# Altium PCB NBP12 Xilinx Spartan-IIE BGA456 Rev1.00.PcbDoc (part 1 of 2)
Units mm, origin at the board's own origin, x right, y up, seen from the top; angles counter-clockwise.
Board outline 69 x 80.99 mm, 4 copper layers (Top Layer, MidLayer1, InternalPlane1, Bottom Layer); 54 components, 265 nets, 866 pads, 396 vias.
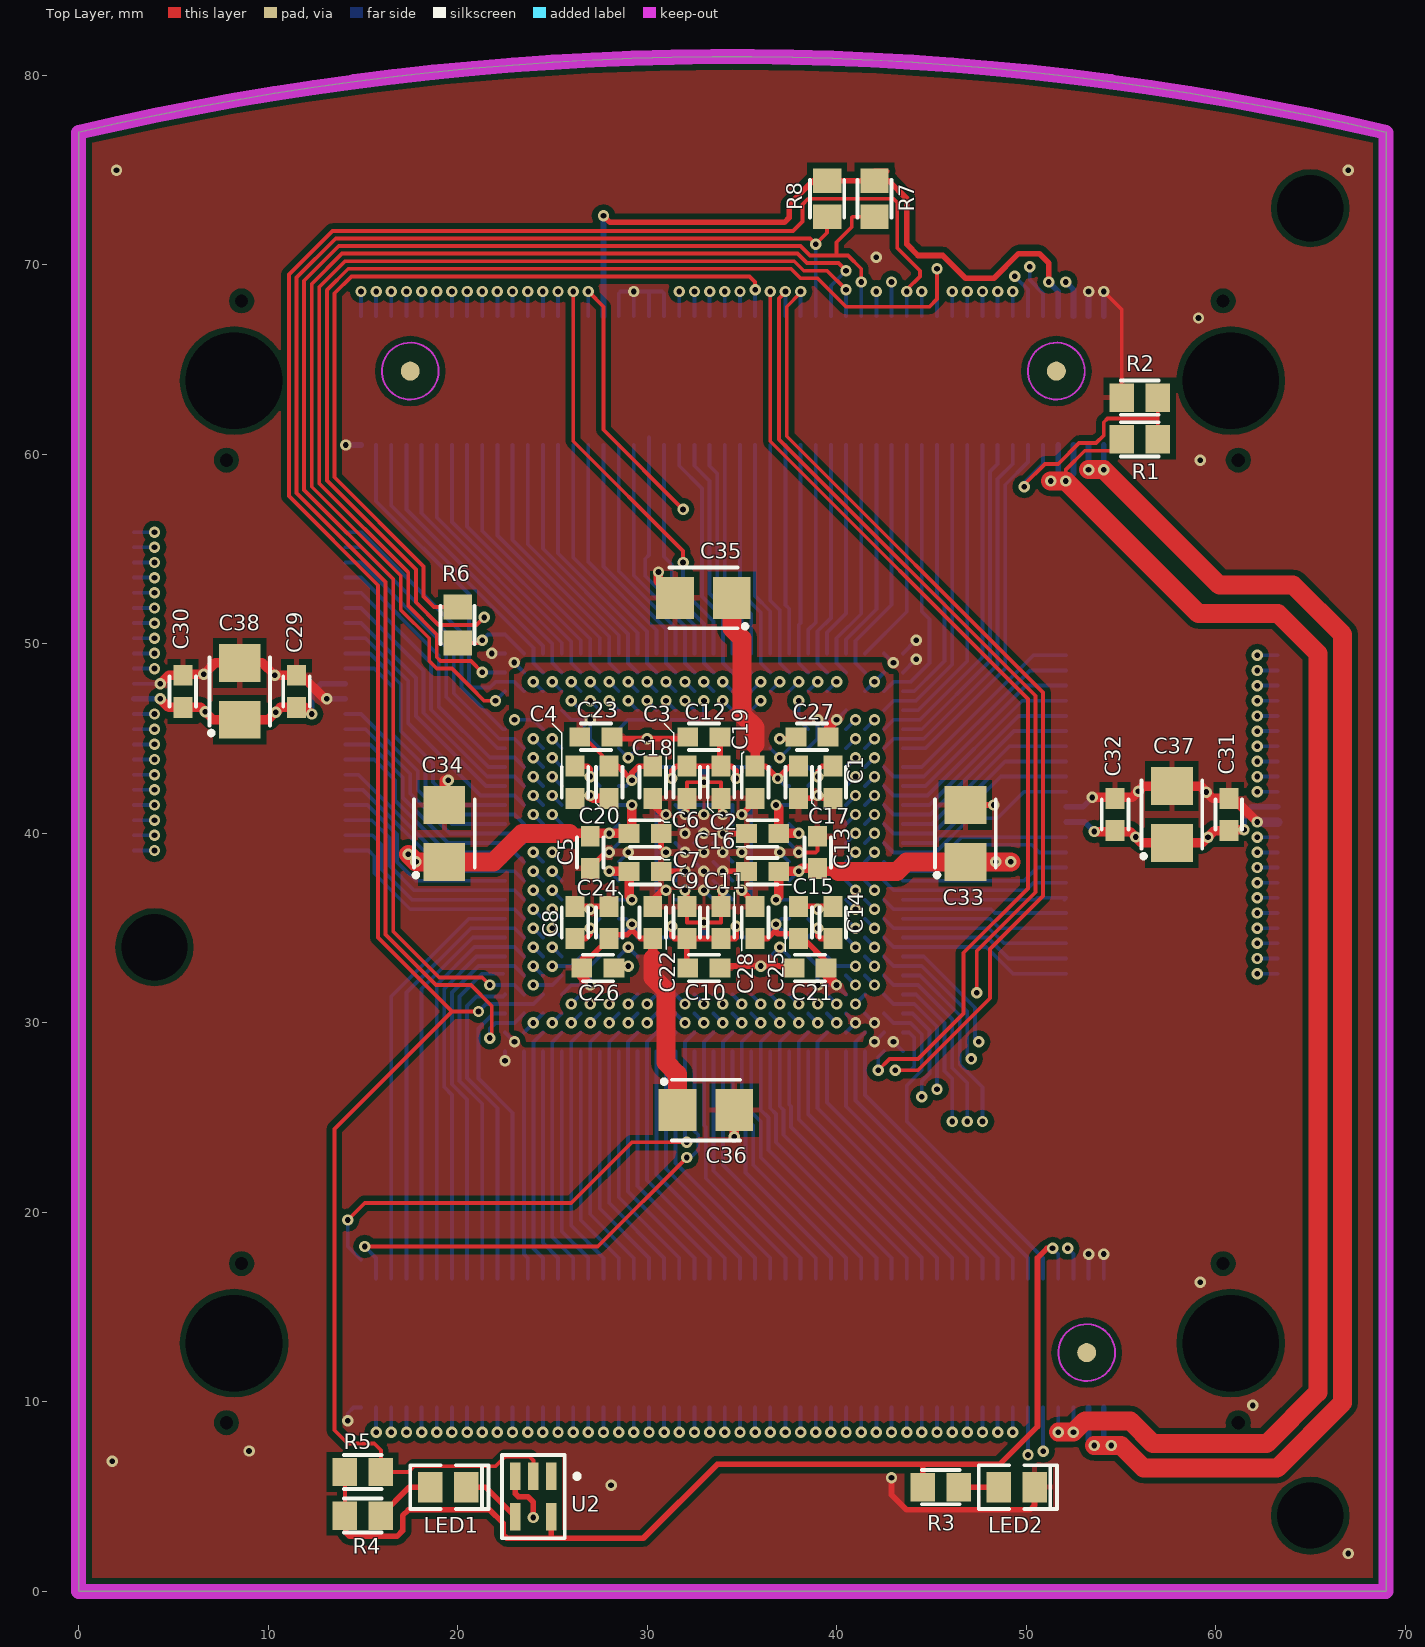
[diagram p0: Top Layer view]
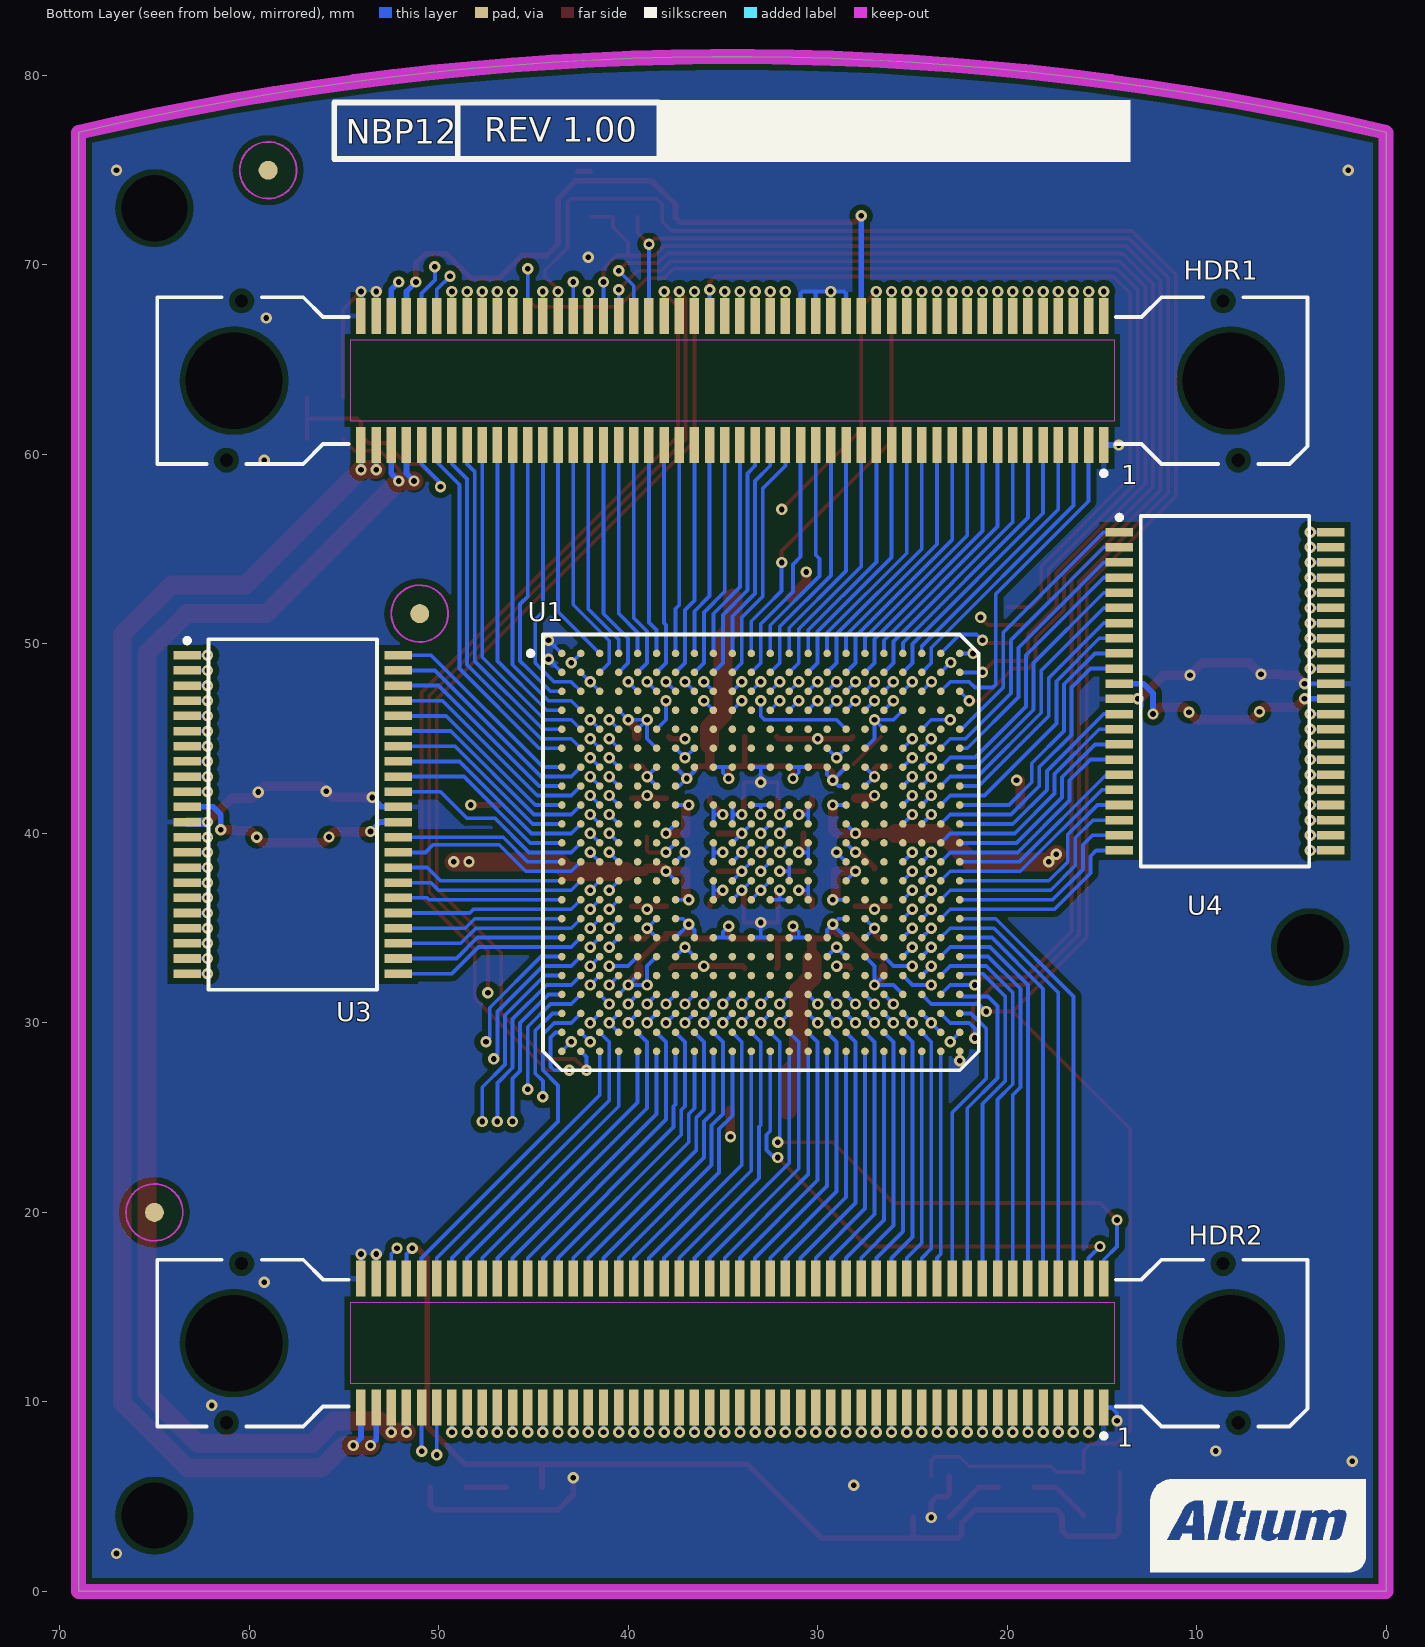
[diagram p1: Bottom Layer view, seen from below]
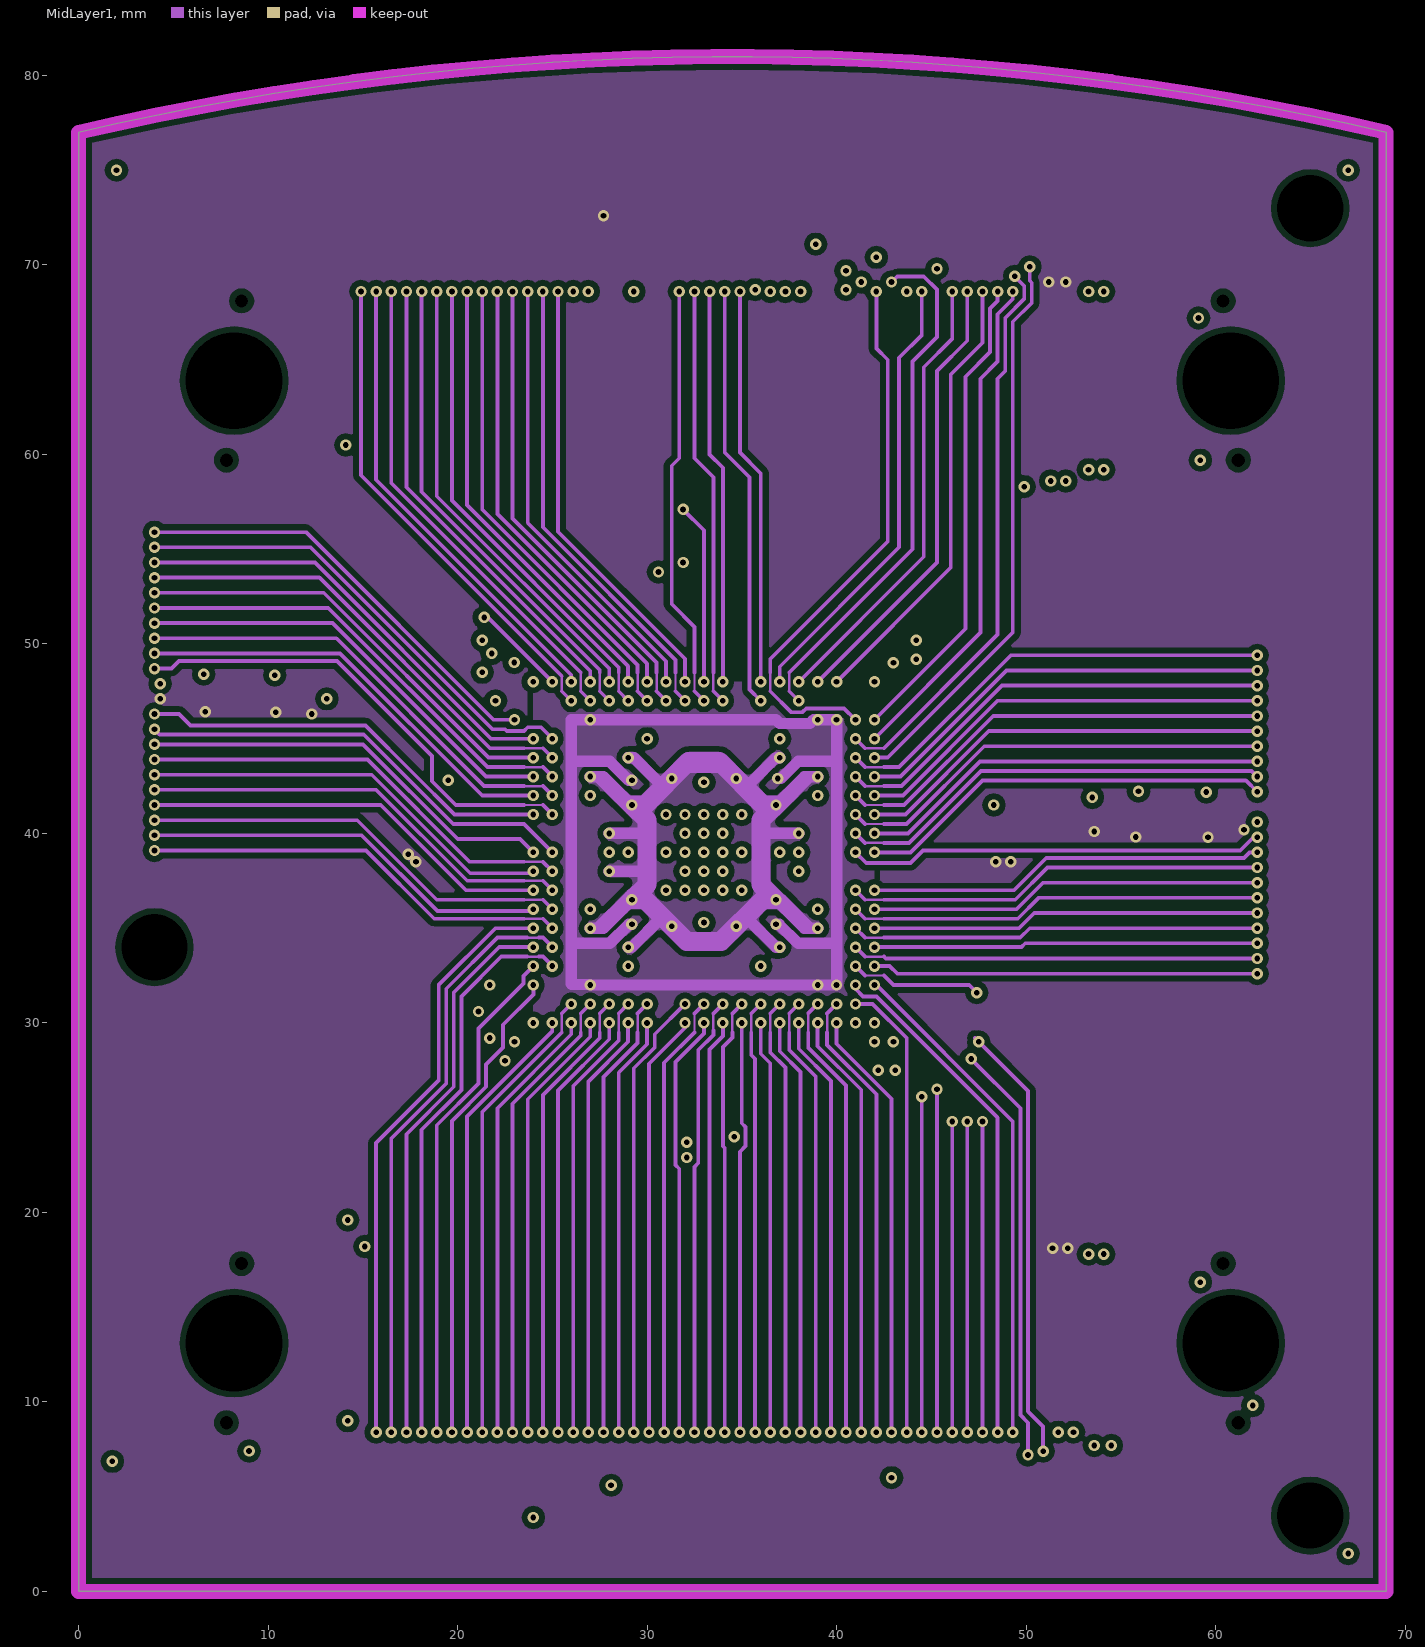
[diagram p2: MidLayer1]
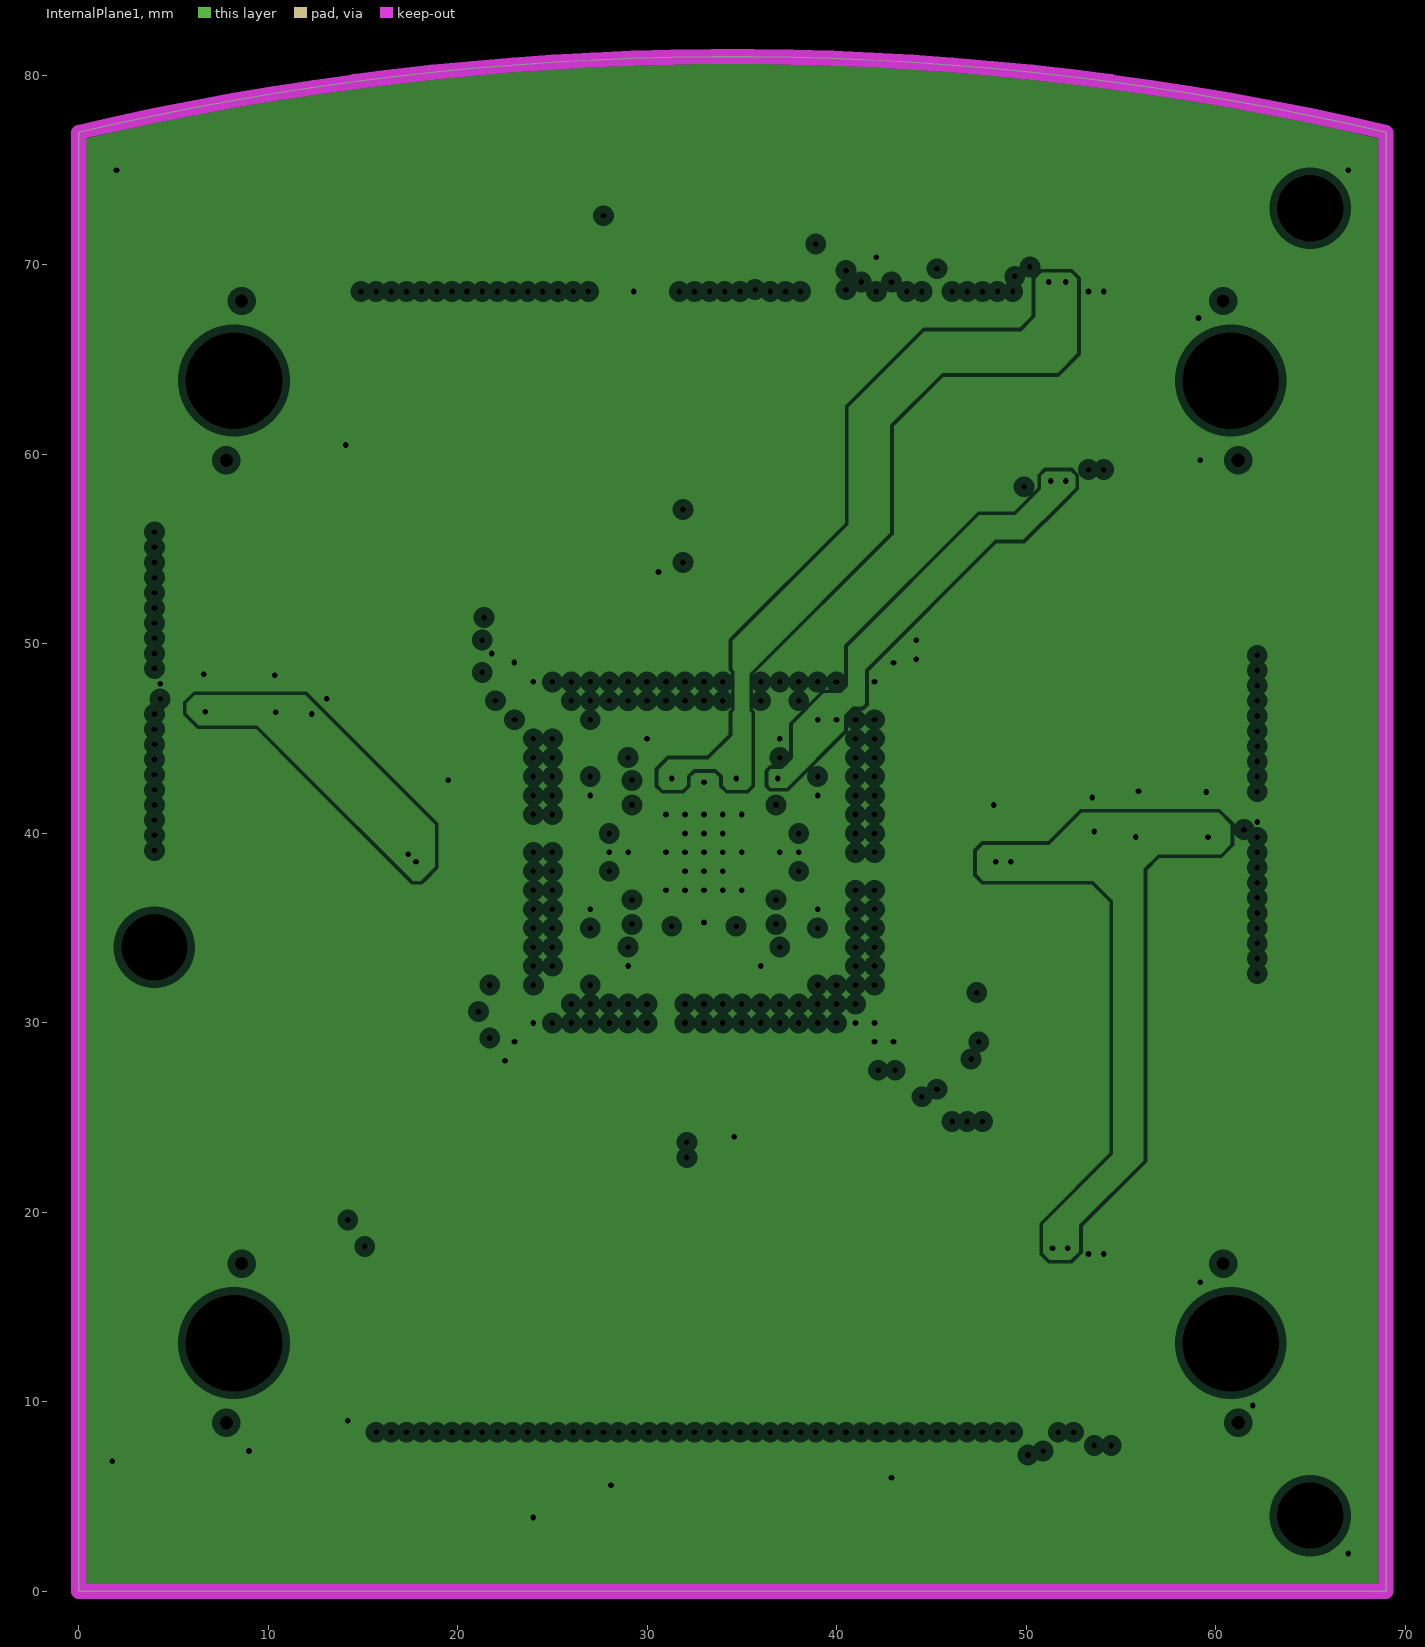
[diagram p3: InternalPlane1, clearances drawn from the general rule]

## Layer stack, top to bottom
Top Layer: signal copper 0.0356
Dielectric: core 0.32, FR-4, Dk 4.8
MidLayer1: signal copper 0.0356
Dielectric: prepreg 0.32, FR-4, Dk 4.8
InternalPlane1: plane copper 0.0356, net (Multiple Nets)
Dielectric: core 0.32, FR-4, Dk 4.8
Bottom Layer: signal copper 0.0356

## Board outline
0,0 0.001,77 cw(c34.5,-69.801) 69,77 69,0

## Design rules (kind name [scope] priority, off if disabled: settings)
Clearance Clearance_Mid [OnLayer('MidLayer1') and not(InPoly) vs (IsVia)] p1: gap=0.127
Clearance Clearance_Polygons [InPoly] p2: gap=0.3
Clearance Clearance_Std [All] p3: gap=0.2
ComponentClearance [All] p1: gap=0.2 collisioncheckmode=3 verticalgap=0.254 showdistances=FALSE
FabricationTestPointUsage TestPointUsage [All] p1 off: valid=0 allowmultiple=FALSE
FabricationTestpoint Testpoint [All] p1 off: side=3 testpointundercomponent=TRUE minsize=1.016 maxsize=2.54 preferedsize=1.524 minholesize=0 maxholesize=1.016 preferedholesize=0.813 testpointgrid=0.025 allowsidetop=TRUE allowsidebottom=TRUE usegrid=TRUE gridtolerance=0
HoleSize [All] p1: absolutevalues=TRUE maxlimit=5.2 minlimit=0.25 maxpercent=80.000 minpercent=20.000
MinimumAnnularRing [not inpadclass('Mounting Holes')] p1: minimumring=0.051
PlaneClearance [All] p1: clearance=0.4
PlaneConnect [All] p1: planeconnectstyle=Direct reliefexpansion=0.2 reliefentries=4 reliefconductorwidth=0.2 reliefairgap=0.2
PolygonConnect FPGA_Connect [(InComponent('U1') AND InNet('GND'))] p1: connectstyle=NoConnect reliefconductorwidth=0.254 reliefentries=4 polygonreliefangle="90 Angle"
PolygonConnect [All] p2: connectstyle=Relief reliefconductorwidth=0.3 reliefentries=4 polygonreliefangle="90 Angle"
RoutingLayers [All] p1: top layer_v5=TRUE mid layer 1_v5=FALSE bottom layer_v5=TRUE
RoutingVias [All] p1: holewidth=0.3 width=0.6 viastyle="Through Hole" minholewidth=0.3 minwidth=0.6 maxholewidth=0.5 maxwidth=0.9
SMDNeckDown [All] p1: percent=100.000
SilkscreenOverComponentPads [All] p1: minsilkscreentomaskgap=0.254
SolderMaskExpansion SolderMaskExpansion_Vias [IsVia] p1: expansion=-0.15
SolderMaskExpansion [All] p2: expansion=0.1
Width Width_Arc [isarc] p1: maxlimit=0.8 minlimit=0.1 preferedwidth=0.1
Width [All] p2: maxlimit=1.5 minlimit=0.127 preferedwidth=0.2
20 further rules are at their usual default settings.

## Classes and differential pairs
pad class "Mounting Holes": Free-LP HDR1-MH1 HDR1-MH2 HDR1-MH3 HDR1-MH4 HDR1-MH5 HDR1-MH6 HDR2-MH1 HDR2-MH2 HDR2-MH3 HDR2-MH4 HDR2-MH5 HDR2-MH6

## Components (designator, comment, footprint, x,y, rotation, side; value= is the part's Value field where it differs from the comment)
C1 "0.1uF" CC1608-0603 39.8,42.7 r90 top
C2 "0.1uF" CC1608-0603 33.9,42.7 r90 top
C3 "0.1uF" CC1608-0603 32.1,42.7 r90 top
C4 "0.1uF" CC1608-0603 26.2,42.7 r90 top
C5 "0.1uF" CC1608-0603 27,39 r90 top
C6 "0.1uF" CC1608-0603 29.9,40 r180 top
C7 "0.1uF" CC1608-0603 29.9,38 r180 top
C8 "0.1uF" CC1608-0603 26.2,35.3 r270 top
C9 "0.1uF" CC1608-0603 32.1,35.3 r270 top
C10 "0.1uF" CC1608-0603 33,32.9 r180 top
C11 "0.1uF" CC1608-0603 33.9,35.3 r270 top
C12 "0.1uF" CC1608-0603 33,45.1 r0 top
C13 "0.1uF" CC1608-0603 39,39 r270 top
C14 "0.1uF" CC1608-0603 39.8,35.3 r270 top
C15 "0.1uF" CC1608-0603 36.1,38 r0 top
C16 "0.1uF" CC1608-0603 36.1,40 r0 top
C17 "0.1uF" CC1608-0603 38,42.7 r90 top
C18 "0.1uF" CC1608-0603 30.3,42.7 r90 top
C19 "0.1uF" CC1608-0603 35.7,42.7 r90 top
C20 "0.1uF" CC1608-0603 28,42.7 r90 top
C21 "0.1uF" CC1608-0603 38.6,32.9 r0 top
C22 "0.1uF" CC1608-0603 30.3,35.3 r270 top
C23 "0.1uF" CC1608-0603 27.3,45.1 r180 top
C24 "0.1uF" CC1608-0603 28,35.3 r270 top
C25 "0.1uF" CC1608-0603 38,35.3 r270 top
C26 "0.1uF" CC1608-0603 27.4,32.9 r180 top
C27 "0.1uF" CC1608-0603 38.7,45.1 r0 top
C28 "0.1uF" CC1608-0603 35.7,35.3 r270 top
C29 "0.1uF" CC1608-0603 11.5,47.5 r270 top
C30 "0.1uF" CC1608-0603 5.5,47.5 r270 top
C31 "0.1uF" CC1608-0603 60.7,41 r270 top
C32 "0.1uF" CC1608-0603 54.7,41 r270 top
C33 "10uF" MCCT-B 46.8,40 r90 top
C34 "10uF" MCCT-B 19.3,40 r90 top
C35 "10uF" MCCT-B 32.971,52.429 r180 top
C36 "10uF" MCCT-B 33.1,25.4 r0 top
C37 "10uF" MCCT-B 57.7,41 r90 top
C38 "10uF" MCCT-B 8.5,47.5 r90 top
HDR1 "54075-1009" 54075 34.5,63.9 r0 bottom locked
HDR2 "54075-1009" 54075 34.5,13.1 r0 bottom locked
LED1 "HSMG-C670" "SMD _LED" 19.5,5.5 r180 top locked
LED2 "HSMH-C670" "SMD _LED" 49.5,5.5 r180 top locked
R1 "DO NOT INSTALL" CC2012-0805#1 56,60.8 r0 top
R2 "DO NOT INSTALL" CC2012-0805#1 56,63 r180 top
R3 "270R" CC2012-0805#1 45.5,5.5 r0 top
R4 "270R" CC2012-0805#1 15,4 r0 top
R5 "4K7" CC2012-0805#1 15,6.3 r0 top
R6 "100R" CC2012-0805#2 20,51 r90 top
R7 "4K7" CC2012-0805#1 42,73.5 r270 top
R8 "4K7" CC2012-0805#1 39.5,73.5 r270 top
U1 "XC2S600E-6FG456C" FG456 33,39 r180 bottom locked
U2 "SN74AHC1G04DBVR" SO-G5/P.95 24,5 r180 top
U3 "SRAM 512Kx16 TSOP44" SO-G44/P.8 57.7,41 r270 bottom
U4 "SRAM 512Kx16 TSOP44" SO-G44/P.8 8.5,47.5 r270 bottom locked

## Footprints (in the part's own frame and the unit in brackets; to place one, negate y for a bottom-side part, rotate by r counter-clockwise, add the part's x,y. Pads: shape width x height; smd on the part's side, far side on the other; paste and mask are expansions set on the pad)
54075 [mm] "Connector; Docking Station, Receptacle; 100 Position; Vertical"
  rect 0.5x1.9 smd: 1(-19.6,3.4) 2(-19.6,-3.4) 3(-18.8,3.4) 4(-18.8,-3.4) 5(-18,3.4) 6(-18,-3.4) 7(-17.2,3.4) 8(-17.2,-3.4) 9(-16.4,3.4) 10(-16.4,-3.4) 11(-15.6,3.4) 12(-15.6,-3.4) 13(-14.8,3.4) 14(-14.8,-3.4) 15(-14,3.4) 16(-14,-3.4) 17(-13.2,3.4) 18(-13.2,-3.4) 19(-12.4,3.4) 20(-12.4,-3.4) 21(-11.6,3.4) 22(-11.6,-3.4) 23(-10.8,3.4) 24(-10.8,-3.4) 25(-10,3.4) 26(-10,-3.4) 27(-9.2,3.4) 28(-9.2,-3.4) 29(-8.4,3.4) 30(-8.4,-3.4) 31(-7.6,3.4) 32(-7.6,-3.4) 33(-6.8,3.4) 34(-6.8,-3.4) 35(-6,3.4) 36(-6,-3.4) 37(-5.2,3.4) 38(-5.2,-3.4) 39(-4.4,3.4) 40(-4.4,-3.4) 41(-3.6,3.4) 42(-3.6,-3.4) 43(-2.8,3.4) 44(-2.8,-3.4) 45(-2,3.4) 46(-2,-3.4) 47(-1.2,3.4) 48(-1.2,-3.4) 49(-0.4,3.4) 50(-0.4,-3.4) 51(0.4,3.4) 52(0.4,-3.4) 53(1.2,3.4) 54(1.2,-3.4) 55(2,3.4) 56(2,-3.4) 57(2.8,3.4) 58(2.8,-3.4) 59(3.6,3.4) 60(3.6,-3.4) 61(4.4,3.4) 62(4.4,-3.4) 63(5.2,3.4) 64(5.2,-3.4) 65(6,3.4) 66(6,-3.4) 67(6.8,3.4) 68(6.8,-3.4) 69(7.6,3.4) 70(7.6,-3.4) 71(8.4,3.4) 72(8.4,-3.4) 73(9.2,3.4) 74(9.2,-3.4) 75(10,3.4) 76(10,-3.4) 77(10.8,3.4) 78(10.8,-3.4) 79(11.6,3.4) 80(11.6,-3.4) 81(12.4,3.4) 82(12.4,-3.4) 83(13.2,3.4) 84(13.2,-3.4) 85(14,3.4) 86(14,-3.4) 87(14.8,3.4) 88(14.8,-3.4) 89(15.6,3.4) 90(15.6,-3.4) 91(16.4,3.4) 92(16.4,-3.4) 93(17.2,3.4) 94(17.2,-3.4) 95(18,3.4) 96(18,-3.4) 97(18.8,3.4) 98(18.8,-3.4) 99(19.6,3.4) 100(19.6,-3.4)
  round 0.5 hole 0.7 unplated: MH1(-26.7,4.2) MH2(-25.9,-4.2) MH3(26.7,4.2) MH4(25.9,-4.2)
  round 4.8 hole 5.1 unplated: MH5(-26.3,0) MH6(26.3,0)
  Top Layer keep-out region: -20.15,2.15 20.15,2.15 20.15,-2.15 -20.15,-2.15
  silkscreen extent -30.35,-4.4 30.35,5.02
CC1608-0603 [mm]
  rect 1.1x1 smd: 1(-0.85,0) 2(0.85,0)
  silkscreen extent -0.8,-0.7 0.8,0.7
CC2012-0805#1 [mm]
  rect 1.3x1.5 smd: 1(-0.95,0) 2(0.95,0)
  silkscreen extent -1,-0.9 1,0.9
CC2012-0805#2 [mm]
  rect 1.3x1.5 smd: 1(-0.95,0.003) 2(0.95,0.003)
  silkscreen extent -1,-0.9 1,0.9
FG456 [mm] "456-Ball Fine Pitch Ball Grid Array (FG456)"
  round 0.4 smd: A1(-10.5,10.5) A2(-9.5,10.5) A3(-8.5,10.5) A4(-7.5,10.5) A5(-6.5,10.5) A6(-5.5,10.5) A7(-4.5,10.5) A8(-3.5,10.5) A9(-2.5,10.5) A10(-1.5,10.5) A11(-0.5,10.5) A12(0.5,10.5) A13(1.5,10.5) A14(2.5,10.5) A15(3.5,10.5) A16(4.5,10.5) A17(5.5,10.5) A18(6.5,10.5) A19(7.5,10.5) A20(8.5,10.5) A21(9.5,10.5) A22(10.5,10.5) AA1(-10.5,-9.5) AA2(-9.5,-9.5) AA3(-8.5,-9.5) AA4(-7.5,-9.5) AA5(-6.5,-9.5) AA6(-5.5,-9.5) AA7(-4.5,-9.5) AA8(-3.5,-9.5) AA9(-2.5,-9.5) AA10(-1.5,-9.5) AA11(-0.5,-9.5) AA12(0.5,-9.5) AA13(1.5,-9.5) AA14(2.5,-9.5) AA15(3.5,-9.5) AA16(4.5,-9.5) AA17(5.5,-9.5) AA18(6.5,-9.5) AA19(7.5,-9.5) AA20(8.5,-9.5) AA21(9.5,-9.5) AA22(10.5,-9.5) AB1(-10.5,-10.5) AB2(-9.5,-10.5) AB3(-8.5,-10.5) AB4(-7.5,-10.5) AB5(-6.5,-10.5) AB6(-5.5,-10.5) AB7(-4.5,-10.5) AB8(-3.5,-10.5) AB9(-2.5,-10.5) AB10(-1.5,-10.5) AB11(-0.5,-10.5) AB12(0.5,-10.5) AB13(1.5,-10.5) AB14(2.5,-10.5) AB15(3.5,-10.5) AB16(4.5,-10.5) AB17(5.5,-10.5) AB18(6.5,-10.5) AB19(7.5,-10.5) AB20(8.5,-10.5) AB21(9.5,-10.5) AB22(10.5,-10.5) B1(-10.5,9.5) B2(-9.5,9.5) B3(-8.5,9.5) B4(-7.5,9.5) B5(-6.5,9.5) B6(-5.5,9.5) B7(-4.5,9.5) B8(-3.5,9.5) B9(-2.5,9.5) B10(-1.5,9.5) B11(-0.5,9.5) B12(0.5,9.5) B13(1.5,9.5) B14(2.5,9.5) B15(3.5,9.5) B16(4.5,9.5) B17(5.5,9.5) B18(6.5,9.5) B19(7.5,9.5) B20(8.5,9.5) B21(9.5,9.5) B22(10.5,9.5) C1(-10.5,8.5) C2(-9.5,8.5) C3(-8.5,8.5) C4(-7.5,8.5) C5(-6.5,8.5) C6(-5.5,8.5) C7(-4.5,8.5) C8(-3.5,8.5) C9(-2.5,8.5) C10(-1.5,8.5) C11(-0.5,8.5) C12(0.5,8.5) C13(1.5,8.5) C14(2.5,8.5) C15(3.5,8.5) C16(4.5,8.5) C17(5.5,8.5) C18(6.5,8.5) C19(7.5,8.5) C20(8.5,8.5) C21(9.5,8.5) C22(10.5,8.5) D1(-10.5,7.5) D2(-9.5,7.5) D3(-8.5,7.5) D4(-7.5,7.5) D5(-6.5,7.5) D6(-5.5,7.5) D7(-4.5,7.5) D8(-3.5,7.5) D9(-2.5,7.5) D10(-1.5,7.5) D11(-0.5,7.5) D12(0.5,7.5) D13(1.5,7.5) D14(2.5,7.5) D15(3.5,7.5) D16(4.5,7.5) D17(5.5,7.5) D18(6.5,7.5) D19(7.5,7.5) D20(8.5,7.5) D21(9.5,7.5) D22(10.5,7.5) E1(-10.5,6.5) E2(-9.5,6.5) E3(-8.5,6.5) E4(-7.5,6.5) E5(-6.5,6.5) E6(-5.5,6.5) E7(-4.5,6.5) E8(-3.5,6.5) E9(-2.5,6.5) E10(-1.5,6.5) E11(-0.5,6.5) E12(0.5,6.5) E13(1.5,6.5) E14(2.5,6.5) E15(3.5,6.5) E16(4.5,6.5) E17(5.5,6.5) E18(6.5,6.5) E19(7.5,6.5) E20(8.5,6.5) E21(9.5,6.5) E22(10.5,6.5) F1(-10.5,5.5) F2(-9.5,5.5) F3(-8.5,5.5) F4(-7.5,5.5) F5(-6.5,5.5) F6(-5.5,5.5) F7(-4.5,5.5) F8(-3.5,5.5) F9(-2.5,5.5) F10(-1.5,5.5) F11(-0.5,5.5) F12(0.5,5.5) F13(1.5,5.5) F14(2.5,5.5) F15(3.5,5.5) F16(4.5,5.5) F17(5.5,5.5) F18(6.5,5.5) F19(7.5,5.5) F20(8.5,5.5) F21(9.5,5.5) F22(10.5,5.5) G1(-10.5,4.5) G2(-9.5,4.5) G3(-8.5,4.5) G4(-7.5,4.5) G5(-6.5,4.5) G6(-5.5,4.5) G7(-4.5,4.5) G8(-3.5,4.5) G9(-2.5,4.5) G10(-1.5,4.5) G11(-0.5,4.5) G12(0.5,4.5) G13(1.5,4.5) G14(2.5,4.5) G15(3.5,4.5) G16(4.5,4.5) G17(5.5,4.5) G18(6.5,4.5) G19(7.5,4.5) G20(8.5,4.5) G21(9.5,4.5) G22(10.5,4.5) H1(-10.5,3.5) H2(-9.5,3.5) H3(-8.5,3.5) H4(-7.5,3.5) H5(-6.5,3.5) H6(-5.5,3.5) H7(-4.5,3.5) H16(4.5,3.5) H17(5.5,3.5) H18(6.5,3.5) H19(7.5,3.5) H20(8.5,3.5) H21(9.5,3.5) H22(10.5,3.5) J1(-10.5,2.5) J2(-9.5,2.5) J3(-8.5,2.5) J4(-7.5,2.5) J5(-6.5,2.5) J6(-5.5,2.5) J7(-4.5,2.5) J9(-2.5,2.5) J10(-1.5,2.5) J11(-0.5,2.5) J12(0.5,2.5) J13(1.5,2.5) J14(2.5,2.5) J16(4.5,2.5) J17(5.5,2.5) J18(6.5,2.5) J19(7.5,2.5) J20(8.5,2.5) J21(9.5,2.5) J22(10.5,2.5) K1(-10.5,1.5) K2(-9.5,1.5) K3(-8.5,1.5) K4(-7.5,1.5) K5(-6.5,1.5) K6(-5.5,1.5) K7(-4.5,1.5) K9(-2.5,1.5) K10(-1.5,1.5) K11(-0.5,1.5) K12(0.5,1.5) K13(1.5,1.5) K14(2.5,1.5) K16(4.5,1.5) K17(5.5,1.5) K18(6.5,1.5) K19(7.5,1.5) K20(8.5,1.5) K21(9.5,1.5) K22(10.5,1.5) L1(-10.5,0.5) L2(-9.5,0.5) L3(-8.5,0.5) L4(-7.5,0.5) L5(-6.5,0.5) L6(-5.5,0.5) L7(-4.5,0.5) L9(-2.5,0.5) L10(-1.5,0.5) L11(-0.5,0.5) L12(0.5,0.5) L13(1.5,0.5) L14(2.5,0.5) L16(4.5,0.5) L17(5.5,0.5) L18(6.5,0.5) L19(7.5,0.5) L20(8.5,0.5) L21(9.5,0.5) L22(10.5,0.5) M1(-10.5,-0.5) M2(-9.5,-0.5) M3(-8.5,-0.5) M4(-7.5,-0.5) M5(-6.5,-0.5) M6(-5.5,-0.5) M7(-4.5,-0.5) M9(-2.5,-0.5) M10(-1.5,-0.5) M11(-0.5,-0.5) M12(0.5,-0.5) M13(1.5,-0.5) M14(2.5,-0.5) M16(4.5,-0.5) M17(5.5,-0.5) M18(6.5,-0.5) M19(7.5,-0.5) M20(8.5,-0.5) M21(9.5,-0.5) M22(10.5,-0.5) N1(-10.5,-1.5) N2(-9.5,-1.5) N3(-8.5,-1.5) N4(-7.5,-1.5) N5(-6.5,-1.5) N6(-5.5,-1.5) N7(-4.5,-1.5) N9(-2.5,-1.5) N10(-1.5,-1.5) N11(-0.5,-1.5) N12(0.5,-1.5) N13(1.5,-1.5) N14(2.5,-1.5) N16(4.5,-1.5) N17(5.5,-1.5) N18(6.5,-1.5) N19(7.5,-1.5) N20(8.5,-1.5) N21(9.5,-1.5) N22(10.5,-1.5) P1(-10.5,-2.5) P2(-9.5,-2.5) P3(-8.5,-2.5) P4(-7.5,-2.5) P5(-6.5,-2.5) P6(-5.5,-2.5) P7(-4.5,-2.5) P9(-2.5,-2.5) P10(-1.5,-2.5) P11(-0.5,-2.5) P12(0.5,-2.5) P13(1.5,-2.5) P14(2.5,-2.5) P16(4.5,-2.5) P17(5.5,-2.5) P18(6.5,-2.5) P19(7.5,-2.5) P20(8.5,-2.5) P21(9.5,-2.5) P22(10.5,-2.5) R1(-10.5,-3.5) R2(-9.5,-3.5) R3(-8.5,-3.5) R4(-7.5,-3.5) R5(-6.5,-3.5) R6(-5.5,-3.5) R7(-4.5,-3.5) R16(4.5,-3.5) R17(5.5,-3.5) R18(6.5,-3.5) R19(7.5,-3.5) R20(8.5,-3.5) R21(9.5,-3.5) R22(10.5,-3.5) T1(-10.5,-4.5) T2(-9.5,-4.5) T3(-8.5,-4.5) T4(-7.5,-4.5) T5(-6.5,-4.5) T6(-5.5,-4.5) T7(-4.5,-4.5) T8(-3.5,-4.5) T9(-2.5,-4.5) T10(-1.5,-4.5) T11(-0.5,-4.5) T12(0.5,-4.5) T13(1.5,-4.5) T14(2.5,-4.5) T15(3.5,-4.5) T16(4.5,-4.5) T17(5.5,-4.5) T18(6.5,-4.5) T19(7.5,-4.5) T20(8.5,-4.5) T21(9.5,-4.5) T22(10.5,-4.5) U1(-10.5,-5.5) U2(-9.5,-5.5) U3(-8.5,-5.5) U4(-7.5,-5.5) U5(-6.5,-5.5) U6(-5.5,-5.5) U7(-4.5,-5.5) U8(-3.5,-5.5) U9(-2.5,-5.5) U10(-1.5,-5.5) U11(-0.5,-5.5) U12(0.5,-5.5) U13(1.5,-5.5) U14(2.5,-5.5) U15(3.5,-5.5) U16(4.5,-5.5) U17(5.5,-5.5) U18(6.5,-5.5) U19(7.5,-5.5) U20(8.5,-5.5) U21(9.5,-5.5) U22(10.5,-5.5) V1(-10.5,-6.5) V2(-9.5,-6.5) V3(-8.5,-6.5) V4(-7.5,-6.5) V5(-6.5,-6.5) V6(-5.5,-6.5) V7(-4.5,-6.5) V8(-3.5,-6.5) V9(-2.5,-6.5) V10(-1.5,-6.5) V11(-0.5,-6.5) V12(0.5,-6.5) V13(1.5,-6.5) V14(2.5,-6.5) V15(3.5,-6.5) V16(4.5,-6.5) V17(5.5,-6.5) V18(6.5,-6.5) V19(7.5,-6.5) V20(8.5,-6.5) V21(9.5,-6.5) V22(10.5,-6.5) W1(-10.5,-7.5) W2(-9.5,-7.5) W3(-8.5,-7.5) W4(-7.5,-7.5) W5(-6.5,-7.5) W6(-5.5,-7.5) W7(-4.5,-7.5) W8(-3.5,-7.5) W9(-2.5,-7.5) W10(-1.5,-7.5) W11(-0.5,-7.5) W12(0.5,-7.5) W13(1.5,-7.5) W14(2.5,-7.5) W15(3.5,-7.5) W16(4.5,-7.5) W17(5.5,-7.5) W18(6.5,-7.5) W19(7.5,-7.5) W20(8.5,-7.5) W21(9.5,-7.5) W22(10.5,-7.5) Y1(-10.5,-8.5) Y2(-9.5,-8.5) Y3(-8.5,-8.5) Y4(-7.5,-8.5) Y5(-6.5,-8.5) Y6(-5.5,-8.5) Y7(-4.5,-8.5) Y8(-3.5,-8.5) Y9(-2.5,-8.5) Y10(-1.5,-8.5) Y11(-0.5,-8.5) Y12(0.5,-8.5) Y13(1.5,-8.5) Y14(2.5,-8.5) Y15(3.5,-8.5) Y16(4.5,-8.5) Y17(5.5,-8.5) Y18(6.5,-8.5) Y19(7.5,-8.5) Y20(8.5,-8.5) Y21(9.5,-8.5) Y22(10.5,-8.5)
  silkscreen extent -12.28,-11.5 11.5,11.5
MCCT-B [mm]
  rect 2x2.2 smd: 1(-1.5,0) 2(1.5,0)
  silkscreen extent -2.3,-1.6 1.8,1.6
"SMD _LED" [mm]
  rect 1.3x1.6 smd: 1(0.95,0) 2(-0.95,0)
  silkscreen extent -2.13,-1.15 2,1.15
SO-G5/P.95 [mm]
  rect 0.55x1.45 smd: 1(-0.95,-1.075) 2(0,-1.075) 3(0.95,-1.075) 4(0.95,1.075) 5(-0.95,1.075)
  silkscreen extent -2.43,-2.2 1.65,2.2
SO-G44/P.8 [mm]
  rect 0.45x1.45 smd: 1(-8.4,-5.575) 2(-7.6,-5.575) 3(-6.8,-5.575) 4(-6,-5.575) 5(-5.2,-5.575) 6(-4.4,-5.575) 7(-3.6,-5.575) 8(-2.8,-5.575) 9(-2,-5.575) 10(-1.2,-5.575) 11(-0.4,-5.575) 12(0.4,-5.575) 13(1.2,-5.575) 14(2,-5.575) 15(2.8,-5.575) 16(3.6,-5.575) 17(4.4,-5.575) 18(5.2,-5.575) 19(6,-5.575) 20(6.8,-5.575) 21(7.6,-5.575) 22(8.4,-5.575) 23(8.4,5.575) 24(7.6,5.575) 25(6.8,5.575) 26(6,5.575) 27(5.2,5.575) 28(4.4,5.575) 29(3.6,5.575) 30(2.8,5.575) 31(2,5.575) 32(1.2,5.575) 33(0.4,5.575) 34(-0.4,5.575) 35(-1.2,5.575) 36(-2,5.575) 37(-2.8,5.575) 38(-3.6,5.575) 39(-4.4,5.575) 40(-5.2,5.575) 41(-6,5.575) 42(-6.8,5.575) 43(-7.6,5.575) 44(-8.4,5.575)
  silkscreen extent -9.3,-5.7 9.25,4.45

## Part data
C1 C2 C3 C4 C5 C6 C7 C8 C9 C10 C11 C12 C13 C14 C15 C16 C17 C18 C19 C20 C21 C22 C23 C24 C25 C26 C27 C28 C29 C30 C31 C32: library part CAP, "Capacitor"
C33 C34 C35 C36 C37 C38: library part CAP_POLAR, "Polar Capacitor"
HDR1 HDR2: "Board-to-Board, Docking Station, 0.80mm (.031\") Pitch, Shielded Receptacle, Vertical, Ultra Low Profile, SMT"
LED1: library part HSMX-C670, "GREEN AS AlGaAs SMD LED"
LED2: library part HSMX-C670, "RED AS AlGaAs SMD LED"
R1 R2 R3 R4 R5 R6 R7 R8: library part RES, "Resistor"
U1: "Spartan-IIE 1.8V FPGA, 456-Ball FBGA, Standard Performance, Commercial Grade"
U2: "Single Gate Inverter"
U3 U4: "512Kx16Bit SRAM TSOP44"

## Free pads (board coordinates)
  round 1 smd far side mask+1: FID1(59,75) FID2(51,51.6) FID3(65,20)
  round 1 smd mask+1: FID5(17.5,64.4) FID6(51.6,64.4) FID7(53.2,12.6)
  round 3.2 hole 3.5 unplated: LP(4,34) LP(65,4) LP(65,73)

## Via types
v1: diameter 0.6, hole 0.3, Top Layer to Bottom Layer, tented top, 396 vias

## Nets (pads, with @x,y where several pads share a name; then routed paths per layer and width w, separated by ;. In a path a pad name is that pad's centre, name@x,y a point inside that pad or via, vN(x,y) a via of type N, cw(c..) or ccw(c..) an arc to the next point about the centre after c; other vN are vias at no path point)
5V: HDR1.97 HDR1.99 HDR2.97 HDR2.99 | length 79.5
  Top Layer w1: v1(53.3,59.2) v1(54.1,59.2) 60.2,53.1 64.1,53.1 66.7,50.5 66.7,9.954 63.246,6.5 56.2,6.5 55,7.7 v1(53.6,7.7)
  Bottom Layer w0.3: HDR2.97@53.3,9.7 53.3,8 v1(53.6,7.7) ; v1(53.3,59.2) HDR1.97@53.3,60.5 ; HDR2.99@54.1,9.7 54.1,8.1 v1(54.5,7.7) ; v1(54.1,59.2) HDR1.99@54.1,60.5
AUDIO_SPI_CSN: HDR1.11 U1.A19 | length 13.7
  Bottom Layer w0.2: HDR1.11@18.9,60.5 18.9,56.666 25.5,50.066 U1.A19@25.5,49.5
BLUE0: HDR1.14 U1.D15 | length 27.5
  MidLayer1 w0.127: 28.5,47.5 28.5,48.5
  MidLayer1 w0.2: v1(19.7,68.6) 19.7,57.563 28.5,48.763 28.5,48.5 ; 28.5,47.5 v1(29,47)
  Bottom Layer w0.2: HDR1.14@19.7,67.3 v1(19.7,68.6) ; v1(29,47) U1.D15@29.5,46.5
BLUE1: HDR1.16 U1.C15 | length 26.1
  MidLayer1 w0.2: v1(20.5,68.6) 20.5,57.328 29,48.828 v1(29,48)
  Bottom Layer w0.2: HDR1.16@20.5,67.3 v1(20.5,68.6) ; v1(29,48) U1.C15@29.5,47.5
BOC_CTS: HDR1.13 U1.B18 | length 14.8
  Bottom Layer w0.2: HDR1.13@19.7,60.5 19.7,56.431 26,50.131 26,49 U1.B18@26.5,48.5
BOC_RTS: HDR1.17 U1.B17 | length 14.6
  Bottom Layer w0.2: HDR1.17@21.3,60.5 21.3,55.963 27,50.263 27,49 U1.B17@27.5,48.5
BOC_RX: HDR1.19 U1.A17 | length 13.2
  Bottom Layer w0.2: HDR1.19@22.1,60.5 22.1,55.728 27.5,50.328 U1.A17@27.5,49.5
BOC_TX: HDR1.15 U1.A18 | length 13.5
  Bottom Layer w0.2: HDR1.15@20.5,60.5 20.5,56.197 26.5,50.197 U1.A18@26.5,49.5
BUZZER: HDR2.24 U1.AB21 | length 12.1
  Bottom Layer w0.2: U1.AB21@23.5,28.5 23.5,17.8 23.7,17.6 HDR2.24@23.7,16.5
CAN_RXD: HDR1.4 U1.C18 | length 27.1
  MidLayer1 w0.2: v1(15.7,68.6) 15.7,58.666 26,48.366 v1(26,48)
  Bottom Layer w0.2: HDR1.4@15.7,67.3 v1(15.7,68.6) ; v1@26.146,47.854 v1(26,48) U1.C18@26.5,47.5
CAN_TXD: HDR1.2 U1.D18 | length 28.2
  MidLayer1 w0.127: 25.5,47.5 25.5,48.3
  MidLayer1 w0.2: v1(14.9,68.6) 14.9,58.9 25.5,48.3 ; 25.5,47.5 v1(26,47)
  Bottom Layer w0.2: HDR1.2@14.9,67.3 v1(14.9,68.6) ; v1(26,47) U1.D18@26.5,46.5
FPGA_AUX0: HDR1.86 U1.E3 | length 27.3
  MidLayer1 w0.2: v1(42,46) 46.8,50.8 46.8,64.1 48.1,65.4 48.1,67.7 48.5,68.1 v1(48.5,68.6)
  Bottom Layer w0.2: U1.E3@41.5,45.5 v1(42,46) ; HDR1.86@48.5,67.3 v1(48.5,68.6)
FPGA_AUX1: HDR1.88 U1.F3 | length 28.6
  MidLayer1 w0.2: v1(42,45) 47.6,50.6 47.6,64 48.5,64.9 48.5,67.4 49.3,68.2 v1(49.3,68.6)
  Bottom Layer w0.2: U1.F3@41.5,44.5 v1(42,45) ; HDR1.88@49.3,67.3 v1(49.3,68.6)
FPGA_AUX2: HDR1.90 U1.F4 | length 33
  MidLayer1 w0.127: 41.5,44.5 42.5,44.5
  MidLayer1 w0.2: v1(41,45) 41.5,44.5 ; 42.5,44.5 48.5,50.5 48.5,64 48.9,64.4 48.9,67.2 49.9,68.2 49.9,68.9 v1(49.4,69.4)
  Bottom Layer w0.2: U1.F4@40.5,44.5 v1(41,45) ; v1(49.4,69.4) 50.1,68.7 HDR1.90@50.1,67.3
FPGA_AUX3: HDR1.92 U1.G3 | length 33.4
  MidLayer1 w0.2: v1(42,44) 42.7,44 49.3,50.6 49.3,67 50.3,68 50.3,69.066 50.2,69.166 v1(50.2,69.9)
  Bottom Layer w0.2: U1.G3@41.5,43.5 v1(42,44) ; v1(50.2,69.9) 50.2,69.2 50.9,68.5 HDR1.92@50.9,67.3
FPGA_CCLK: HDR1.66 U1.B22 | length 56.4
  Top Layer w0.2: v1(21.3,48.5) 20.7,49.1 19.1,49.1 18.9,49.3 18.9,50.5 17.4,52 17.4,53.763 12.7,58.463 12.7,68.837 14.063,70.2 37.769,70.2 38.269,69.7 39.5,69.7 v1(40.5,68.7)
  Bottom Layer w0.2: v1(21.3,48.5) U1.B22@22.5,48.5 ; HDR1.66@40.5,67.3 v1(40.5,68.7)
FPGA_CLK: HDR2.2 U1.AA12 | length 28
  Top Layer w0.2: v1(14.2,19.6) 15.1,20.5 26,20.5 29.2,23.7 v1(32.1,23.7)
  Bottom Layer w0.2: v1(14.2,19.6) 14.2,18.2 14.9,17.5 ; v1(32.1,23.7) 32,23.8 32,29 U1.AA12@32.5,29.5
FPGA_CLK_1: HDR1.30 U1.A11 | length 23.5
  Top Layer w0.2: v1(26.1,68.6) 26.1,60.7 31.9,54.9 v1(31.9,54.3)
  Bottom Layer w0.2: HDR1.30@26.1,67.3 v1(26.1,68.6) ; v1(31.9,54.3) 31.9,52.8 32.711,51.989 33.5,51.2 U1.A11@33.5,49.5
FPGA_CLK_2: HDR1.32 U1.C11 | length 25.1
  Top Layer w0.2: v1(26.9,68.6) 27.7,67.8 27.7,61.3 v1(31.9,57.1)
  MidLayer1 w0.2: v1(31.9,57.1) 33,56 v1(33,48)
  Bottom Layer w0.2: HDR1.32@26.9,67.3 v1(26.9,68.6) ; v1(33,48) U1.C11@33.5,47.5
FPGA_DIN: HDR1.64 U1.C22 | length 59.5
  Top Layer w0.2: v1(22,47) 21.4,47 20.65,47.75 19.7,48.7 18.9,48.7 18.5,49.1 18.5,50.3 17,51.8 17,53.597 12.3,58.297 12.3,69.003 13.897,70.6 37.934,70.6 38.434,70.1 40.1,70.1 v1(40.5,69.7)
  Bottom Layer w0.2: v1(22,47) U1.C22@22.5,47.5 ; HDR1.64@39.7,67.3 39.7,68.9 v1(40.5,69.7)
FPGA_DONE: HDR1.74 R5.2 U1.W20 U2.2 | length 127.5
  Top Layer w0.2: v1(21.1,30.6) 19.7,30.6 ; U2.2@24,6.075 24,6.9 23.8,7.1 22.5,7.1 22,6.6 17.7,6.6 17.4,6.3 R5.2@15.95,6.3 15.95,7.45 15.6,7.8 14.2,7.8 13.5,8.5 13.5,24.4 19.7,30.6 ; 43.2,71.6 43.2,70.9 ; v1(43.7,68.6) 43.7,68.7 44.4,69.4 44.4,69.7 43.2,70.9 ; 19.7,30.6 15.8,34.5 15.8,53.1 11.1,57.8 11.1,69.5 13.4,71.8 37.7,71.8 38.2,72.3 38.2,73.2 38.5,73.5 43,73.5 43.2,73.3 43.2,70.9
  Bottom Layer w0.2: v1(21.1,30.6) 21.5,31 24,31 U1.W20@24.5,31.5 ; HDR1.74@43.7,67.3 v1(43.7,68.6)
FPGA_INIT: HDR1.68 R7.2 U1.W21 | length 81.9
  Top Layer w0.2: v1(21.7,32) 21.3,32.4 19.031,32.4 16.6,34.831 16.6,53.431 11.9,58.131 11.9,69.169 13.731,71 25.569,71 ; 25.6,71 38.1,71 38.6,70.5 ; 39.3,70.5 39.2,70.5 38.6,70.5 ; 40,70.5 40,71.2 40.8,72 40.8,72.5 40.85,72.55 R7.2@42,72.55 ; v1(41.3,69.1) 41.3,69.8 40.6,70.5 38.6,70.5
  Bottom Layer w0.2: v1(21.7,32) 23,32 U1.W21@23.5,31.5 ; HDR1.68@41.3,67.3 v1(41.3,69.1)
FPGA_M0: HDR1.60 U1.AA1 | length 55.6
  Top Layer w0.2: v1(38.1,68.6) 38.1,68.532 37.368,67.8 37.368,60.964 50.9,47.431 50.9,36.7 48.1,33.9 48.1,31.3 44.3,27.5 v1(43.1,27.5)
  Bottom Layer w0.2: HDR1.60@38.1,67.3 v1(38.1,68.6) ; v1(43.1,27.5) 43.9,27.5 44.1,27.7 44.1,29.234 43.834,29.5 U1.AA1@43.5,29.5
FPGA_M1: HDR1.58 U1.U5 | length 54
  Top Layer w0.2: v1(37.3,68.6) 37.3,68.556 36.968,68.224 36.968,60.798 50.5,47.266 50.5,36.9 47.4,33.8 v1(47.4,31.6)
  MidLayer1 w0.127: 41.5,32.5 42.5,32.5
  MidLayer1 w0.2: v1(41,33) 41.5,32.5 ; 42.5,32.5 43,32 47,32 v1(47.4,31.6)
  Bottom Layer w0.2: HDR1.58@37.3,67.3 v1(37.3,68.6) ; U1.U5@39.5,33.5 40,33 v1(41,33)
FPGA_M2: HDR1.56 U1.AB2 | length 53.3
  Top Layer w0.2: v1(36.5,68.6) 36.5,60.7 50.1,47.1 50.1,37.1 46.7,33.7 46.7,30.5 44.3,28.1 42.8,28.1 v1(42.2,27.5)
  Bottom Layer w0.2: HDR1.56@36.5,67.3 v1(36.5,68.6) ; v1(42.2,27.5) 42.2,28.2 U1.AB2@42.5,28.5
FPGA_PROGRAM: HDR1.62 R8.2 U1.Y21 | length 82
  Top Layer w0.2: v1(21.7,29.2) 21.8,29.3 21.8,30.9 20.7,32 18.866,32 16.2,34.666 16.2,53.266 11.5,57.966 11.5,69.334 13.566,71.4 38.6,71.4 v1(38.9,71.1) 39.5,71.7 R8.2@39.5,72.55
  Bottom Layer w0.2: v1(21.7,29.2) 21.7,29.7 22,30 23,30 U1.Y21@23.5,30.5 ; HDR1.62@38.9,67.3 v1(38.9,71.1)
FPGA_TCK: HDR1.72 U1.E6 | length 31.7
  MidLayer1 w0.127: 37.5,47.5 37.5,48.5
  MidLayer1 w0.2: 37.5,47.5 v1(38,47) ; 37.5,48.5 44,55 44,64.9 45.3,66.2 45.3,68.7 44.6,69.4 43.2,69.4 v1(42.9,69.1)
  Bottom Layer w0.2: v1(38,47) 38,46 U1.E6@38.5,45.5 ; HDR1.72@42.9,67.3 v1@42.9,69.3
FPGA_TDI: HDR1.78 U1.C19 | length 66.2
  Top Layer w0.2: v1(21.4,51.4) 21,51 19,51 17.8,52.2 17.8,53.928 13.1,58.628 13.1,68.672 14.228,69.8 37.603,69.8 38.103,69.3 39,69.3 40.5,67.8 44.9,67.8 45.3,68.2 v1(45.3,69.8)
  MidLayer1 w0.2: v1(21.4,51.4) 21.6,51.4 22.8,50.2 v1(25,48)
  Bottom Layer w0.2: v1(25,48) U1.C19@25.5,47.5 ; HDR1.78@45.3,67.3 v1(45.3,69.8)
FPGA_TDO: HDR1.54 R6.2 | length 44.5
  Top Layer w0.2: R6.2@19.997,51.95 18.75,51.95 18.2,52.5 18.2,54.094 13.5,58.794 13.5,68.506 14.394,69.4 35.4,69.4 35.7,69.1 v1(35.7,68.7)
  Bottom Layer w0.2: HDR1.54@35.7,67.3 v1(35.7,68.7)
FPGA_TDO#: R6.1 U1.A21 | length 4.1
  Top Layer w0.2: R6.1@19.997,50.05 21.15,50.05 v1(21.3,50.2)
  Bottom Layer w0.2: v1(21.3,50.2) 21.6,50.5 22.5,50.5 U1.A21@23.5,49.5
FPGA_TMS: HDR1.70 U1.E4 | length 31.2
  MidLayer1 w0.127: 36.5,47.5 36.5,48.5
  MidLayer1 w0.2: 36.5,47.5 37.6,46.4 38.2,46.4 38.4,46.6 40.4,46.6 v1(41,46) ; 36.5,48.5 36.5,49.2 42.7,55.4 42.7,65 42.1,65.6 v1(42.1,68.6)
  Bottom Layer w0.2: U1.E4@40.5,45.5 v1(41,46) ; HDR1.70@42.1,67.3 v1(42.1,68.6)
GND: C1.1 C2.1 C3.1 C4.1 C5.1 C6.1 C7.1 C8.1 C9.1 C10.1 C11.1 C12.1 C13.1 C14.1 C15.1 C16.1 C17.1 C18.1 C19.1 C20.1 C21.1 C22.1 C23.1 C24.1 C25.1 C26.1 C27.1 C28.1 C29.1 C30.1 C31.1 C32.1 C33.2 C34.2 C35.2 C36.2 C37.2 C38.2 HDR1.1 HDR1.36 HDR1.38 HDR1.40 HDR1.42 HDR1.98 HDR1.100 HDR2.1 HDR2.98 HDR2.100 LED2.2 R2.2 U1.A1 U1.A2 U1.A22 U1.AA2 U1.AA4 U1.AA21 U1.AA22 U1.AB1 U1.AB22 U1.B1 U1.B2 U1.B21 U1.C3 U1.C20 U1.G11 U1.G12 U1.J9 U1.J10 U1.J11 U1.J12 U1.J13 U1.J14 U1.K9 U1.K10 U1.K11 U1.K12 U1.K13 U1.K14 U1.L7 U1.L9 U1.L10 U1.L11 U1.L12 U1.L13 U1.L14 U1.L16 U1.M7 U1.M9 U1.M10 U1.M11 U1.M12 U1.M13 U1.M14 U1.M16 U1.N9 U1.N10 U1.N11 U1.N12 U1.N13 U1.N14 U1.P9 U1.P10 U1.P11 U1.P12 U1.P13 U1.P14 U1.T11 U1.T12 U1.Y3 U1.Y4 U1.Y20 U2.3 U3.12 U3.34 U4.12 U4.34 | length 149.4
  Top Layer w0.2: v1@26.85,41.85 v1(27,42) ; C9.1@32.1,36.15 32.1,35.3 v1(33,35.3) 33.9,35.3 C11.1@33.9,36.15 ; C3.1@32.1,41.85 32.1,42.7 v1(33,42.7) 33.9,42.7 C2.1@33.9,41.85 ; v1(38,39) 38.9,39 39,39.1 C13.1@39,39.85 ; v1(54.1,68.6) 55.05,67.65 R2.2@55.05,63
  Top Layer w0.3: U2.3@23.05,6.075 23.05,5.15 23.2,5 23.7,5 24,4.7 v1(24,3.9) ; C8.1@26.2,36.15 26.85,36.15 v1(27,36) 27.15,36.15 C24.1@28,36.15 ; C5.1@27,38.15 27,38.2 27.8,39 v1(28,39) ; C23.1@28.15,45.1 28.25,45 v1(30,45) 32.05,45 C12.1@32.15,45.1 ; C26.1@28.25,32.9 28.35,33 v1(29,33) ; C22.1@30.3,36.15 30.3,36.5 30.8,37 v1(31,37) ; C18.1@30.3,41.85 30.3,41.5 30.8,41 v1(31,41) ; C7.1@30.75,38 v1(32,38) ; C6.1@30.75,40 30.75,39.25 v1(31,39) ; v1(32,37) 32.1,36.9 C9.1@32.1,36.15 ; v1(32,41) 32.1,41.1 C3.1@32.1,41.85 ; C10.1@33.85,32.9 33.95,33 v1(36,33) 37.65,33 C21.1@37.75,32.9 ; C11.1@33.9,36.15 33.9,36.9 v1(34,37) ; C2.1@33.9,41.85 33.9,41.1 v1(34,41) ; v1(34,38) C15.1@35.25,38 ; v1(34,40) C16.1@35.25,40 ; v1(35,37) 35.7,36.3 C28.1@35.7,36.15 ; v1(35,41) 35.7,41.7 C19.1@35.7,41.85 ; v1(37,45) 37.75,45 C27.1@37.85,45.1 ; C25.1@38,36.15 38.85,36.15 v1(39,36) 39.15,36.15 C14.1@39.8,36.15 ; C17.1@38,41.85 38.6,41.85 38.75,42 39.15,42 39.3,41.85 C1.1@39.8,41.85 ; v1(42.9,6) 42.9,5.1 43.7,4.3 50.2,4.3 50.45,4.55 LED2.2@50.45,5.5 ; C33.2@46.8,41.5 v1(48.3,41.5)
  Top Layer w0.5: v1(4.3,47.9) 4.75,48.35 C30.1@5.5,48.35 5.55,48.4 v1(6.6,48.4) 7.2,49 9.7,49 v1(10.35,48.35) 11.75,48.35 v1@13,47.1 ; C34.2@19.3,41.5 v1@19.3,42.8 ; v1(27,42) 27.15,41.85 C20.1@28,41.85 ; v1(30.6,53.8) 30.6,53.3 C35.2@31.471,52.429 ; v1(34.6,24) C36.2@34.6,25.4 ; v1(53.5,41.9) 55.6,41.9 56.2,42.5 59.2,42.5 59.85,41.85 60.95,41.85 v1(62.2,40.6)
  Bottom Layer w0.2: U4.34@2.925,47.9 v1(4.3,47.9) ; v1(14.2,9) 14.2,9.4 14.5,9.7 HDR2.1@14.9,9.7 ; v1(21.8,49.5) U1.A22@22.5,49.5 ; v1(22.5,28) U1.AB22@22.5,28.5 ; U1.AA22@22.5,29.5 v1(23,29) ; v1(22.981,49.019) U1.B21@23.5,48.5 ; U1.AA21@23.5,29.5 U1.Y20@24.5,30.5 ; v1(23.987,48.013) U1.C20@24.5,47.5 ; v1(28,39) U1.L16@28.5,39.5 ; U1.M16@28.5,38.5 v1(29,39) ; HDR1.36@28.5,67.3 28.5,68.5 28.6,68.6 30.8,68.6 30.9,68.5 HDR1.42@30.9,67.3 ; HDR1.38@29.3,67.3 v1(29.3,68.6) ; HDR1.40@30.1,67.3 30.1,68.6 ; U1.P14@30.5,36.5 U1.N14@30.5,37.5 ; 30.5,37 v1(31,37) ; U1.M14@30.5,38.5 U1.L14@30.5,39.5 ; 30.5,39 v1(31,39) ; U1.K14@30.5,40.5 U1.J14@30.5,41.5 ; 30.6,41 v1(31,41) ; U1.P13@31.5,36.5 U1.P12@32.5,36.5 ; U1.N13@31.5,37.5 U1.M13@31.5,38.5 ; 31.5,38 v1(32,38) ; U1.L13@31.5,39.5 v1(32,39) ; U1.K13@31.5,40.5 v1(32,40) ; U1.J13@31.5,41.5 v1(32,41) ; 32,36.5 v1(32,37) ; U1.T12@32.5,34.5 U1.T11@33.5,34.5 ; U1.N12@32.5,37.5 v1(33,37) U1.P11@33.5,36.5 ; U1.M12@32.5,38.5 v1(33,38) ; U1.L12@32.5,39.5 v1(33,39) ; U1.K12@32.5,40.5 v1(33,40) ; U1.J12@32.5,41.5 U1.J11@33.5,41.5 ; U1.G12@32.5,43.5 U1.G11@33.5,43.5 ; 33,34.5 v1(33,35.3) ; v1(33,41) 33,41.5 ; v1(33,42.7) 33,43.5 ; U1.N11@33.5,37.5 v1(34,37) U1.P10@34.5,36.5 ; U1.M11@33.5,38.5 v1(34,38) U1.N10@34.5,37.5 ; U1.L11@33.5,39.5 v1(34,39) U1.M10@34.5,38.5 ; U1.K11@33.5,40.5 v1(34,40) U1.L10@34.5,39.5 ; v1(34,41) 34.5,41 ; U1.K10@34.5,40.5 U1.J10@34.5,41.5 ; v1(35,37) 35.5,37 ; v1(35,39) 35.5,39 ; v1(35,41) 35.5,41 ; U1.P9@35.5,36.5 U1.N9@35.5,37.5 ; U1.M9@35.5,38.5 U1.L9@35.5,39.5 ; U1.K9@35.5,40.5 U1.J9@35.5,41.5 ; v1(37,39) U1.M7@37.5,38.5 ; U1.L7@37.5,39.5 v1(38,39) ; U1.AA4@40.5,29.5 v1(41,30) U1.Y4@40.5,30.5 ; U1.Y3@41.5,30.5 v1(42,30) ; U1.C3@41.5,47.5 v1(41.999,47.999) U1.B2@42.5,48.5 ; v1(42,29) U1.AA2@42.5,29.5 ; U1.A2@42.5,49.5 v1(43,49) ; v1(43,29) U1.AB1@43.5,28.5 ; U1.B1@43.5,48.5 v1(44.2,49.2) ; U1.A1@43.5,49.5 v1(44.2,50.2) ; HDR2.98@53.3,16.5 v1(53.3,17.8) ; HDR2.100@54.1,16.5 v1(54.1,17.8)
  Bottom Layer w0.3: v1@13,47.1 U4.12@14.075,47.1 ; v1(14.1,60.5) HDR1.1@14.9,60.5 ; U3.34@52.125,41.4 53,41.4 v1(53.5,41.9) ; HDR1.98@53.3,67.3 v1(53.3,68.6) ; HDR1.100@54.1,67.3 v1(54.1,68.6)
  Bottom Layer w0.5: v1(62.2,40.6) U3.12@63.275,40.6
  other v1: 67,2 28.1,5.6 1.778,6.858 8.995,7.409 61.969,9.813 59.2,16.319 24,30 39,42 59.518,42.182 55.934,42.234 19.5,42.8 13.1,47.1 59.2,59.7 59.1,67.2 42.1,70.4 2,75 67,75
GREEN0: HDR1.10 U1.D16 | length 27.7
  MidLayer1 w0.127: 27.5,47.5 27.5,48.5
  MidLayer1 w0.2: v1(18.1,68.6) 18.1,58.031 27.5,48.631 27.5,48.5 ; 27.5,47.5 v1(28,47)
  Bottom Layer w0.2: HDR1.10@18.1,67.3 v1(18.1,68.6) ; v1(28,47) U1.D16@28.5,46.5
GREEN1: HDR1.12 U1.C16 | length 26.4
  MidLayer1 w0.2: v1(18.9,68.6) 18.9,57.797 28,48.697 v1(28,48)
  Bottom Layer w0.2: HDR1.12@18.9,67.3 v1(18.9,68.6) ; v1(28,48) U1.C16@28.5,47.5
HDRIVE: HDR1.18 U1.D14 | length 27.2
  MidLayer1 w0.128: 29.5,47.5 29.5,48.5
  MidLayer1 w0.2: v1(21.3,68.6) 21.3,57.094 29.5,48.894 29.5,48.5 ; 29.5,47.5 v1(30,47)
  Bottom Layer w0.2: HDR1.18@21.3,67.3 v1(21.3,68.6) ; v1(30,47) U1.D14@30.5,46.5
IO0: HDR2.7 U1.U20 | length 31.4
  MidLayer1 w0.2: v1(17.3,8.4) 17.3,24.128 19.8,26.628 19.8,31.6 22.2,34 v1(24,34)
  Bottom Layer w0.2: v1(17.3,8.4) HDR2.7@17.3,9.7 ; v1(24,34) U1.U20@24.5,33.5
IO1: HDR2.9 U1.U18 | length 32.8
  MidLayer1 w0.127: 23.668,33.5 24.3,33.5
  MidLayer1 w0.2: v1(18.1,8.4) 18.1,24.363 20.2,26.463 20.2,31.4 22.3,33.5 23.668,33.5 ; 24.3,33.5 24.332,33.5 24.5,33.5 v1(25,33)
  Bottom Layer w0.2: v1(18.1,8.4) HDR2.9@18.1,9.7 ; v1(25,33) 26,33 U1.U18@26.5,33.5
IO2: HDR2.11 U1.V20 | length 28.9
  MidLayer1 w0.2: v1(18.9,8.4) 18.9,24.597 21.1,26.797 21.1,29.7 23.479,32.079 23.479,32.479 v1(24,33)
  Bottom Layer w0.2: v1(18.9,8.4) HDR2.11@18.9,9.7 ; v1@24.146,32.854 v1(24,33) U1.V20@24.5,32.5
IO3: HDR2.13 U1.V19 | length 28.4
  MidLayer1 w0.2: v1(19.7,8.4) 19.7,24.831 21.5,26.631 21.5,27.8 22.4,28.7 22.4,29.9 24,31.5 v1(24,32)
  Bottom Layer w0.2: v1(19.7,8.4) HDR2.13@19.7,9.7 ; v1(24,32) 25,32 U1.V19@25.5,32.5
IO4: HDR2.15 U1.Y19 | length 25.6
  MidLayer1 w0.2: v1(20.5,8.4) 20.5,24.7 20.5,25.066 25,29.566 v1(25,30)
  Bottom Layer w0.2: v1(20.5,8.4) HDR2.15@20.5,9.7 ; v1@25.108,30.108 v1(25,30) U1.Y19@25.5,30.5
IO5: HDR2.17 U1.W18 | length 26.6
  MidLayer1 w0.127: 25.5,29.5 25.5,30.5
  MidLayer1 w0.2: v1(21.3,8.4) 21.3,25.3 25.5,29.5 ; 25.5,30.5 v1(26,31)
  Bottom Layer w0.2: v1(21.3,8.4) HDR2.17@21.3,9.7 ; v1(26,31) U1.W18@26.5,31.5
IO6: HDR2.19 U1.Y18 | length 25.2
  MidLayer1 w0.2: v1(22.1,8.4) 22.1,25.5 26,29.4 v1(26,30)
  Bottom Layer w0.2: v1(22.1,8.4) HDR2.19@22.1,9.7 ; v1(26,30) U1.Y18@26.5,30.5
IO7: HDR2.21 U1.W17 | length 26.3
  MidLayer1 w0.127: 26.5,29.5 26.5,30.5
  MidLayer1 w0.2: v1(22.9,8.4) 22.9,25.734 26.5,29.334 26.5,29.5 ; 26.5,30.5 v1(27,31)
  Bottom Layer w0.2: v1(22.9,8.4) HDR2.21@22.9,9.7 ; v1(27,31) U1.W17@27.5,31.5
IO8: HDR2.23 U1.Y17 | length 25
  MidLayer1 w0.2: v1(23.7,8.4) 23.7,25.969 27,29.269 v1(27,30)
  Bottom Layer w0.2: v1(23.7,8.4) HDR2.23@23.7,9.7 ; v1(27,30) U1.Y17@27.5,30.5
IO9: HDR2.25 U1.W16 | length 26.1
  MidLayer1 w0.127: 27.5,29.5 27.5,30.5
  MidLayer1 w0.2: v1(24.5,8.4) 24.5,26.203 27.5,29.203 27.5,29.5 ; 27.5,30.5 v1(28,31)
  Bottom Layer w0.2: v1(24.5,8.4) HDR2.25@24.5,9.7 ; v1(28,31) U1.W16@28.5,31.5
IO10: HDR2.27 U1.Y16 | length 24.7
  MidLayer1 w0.2: v1(25.3,8.4) 25.3,26.437 28,29.137 v1(28,30)
  Bottom Layer w0.2: v1(25.3,8.4) HDR2.27@25.3,9.7 ; v1(28,30) U1.Y16@28.5,30.5
IO11: HDR2.29 U1.W15 | length 25.8
  MidLayer1 w0.127: 28.5,29.5 28.5,30.5
  MidLayer1 w0.2: v1(26.1,8.4) 26.1,26.672 28.5,29.072 28.5,29.5 ; 28.5,30.5 v1(29,31)
  Bottom Layer w0.2: v1(26.1,8.4) HDR2.29@26.1,9.7 ; v1(29,31) U1.W15@29.5,31.5
IO12: HDR2.31 U1.Y15 | length 24.5
  MidLayer1 w0.2: v1(26.9,8.4) 26.9,26.906 29,29.006 v1(29,30)
  Bottom Layer w0.2: v1(26.9,8.4) HDR2.31@26.9,9.7 ; v1(29,30) U1.Y15@29.5,30.5
IO13: HDR2.33 U1.W14 | length 25.6
  MidLayer1 w0.127: 29.5,29.5 29.5,30.5
  MidLayer1 w0.2: v1(27.7,8.4) 27.7,27.14 29.5,28.94 29.5,29.5 ; 29.5,30.5 v1(30,31)
  Bottom Layer w0.2: v1(27.7,8.4) HDR2.33@27.7,9.7 ; v1(30,31) U1.W14@30.5,31.5
IO14: HDR2.35 U1.Y14 | length 24.2
  MidLayer1 w0.2: v1(28.5,8.4) 28.5,27.375 30,28.875 v1(30,30)
  Bottom Layer w0.2: v1(28.5,8.4) HDR2.35@28.5,9.7 ; v1(30,30) U1.Y14@30.5,30.5
IO15: HDR2.37 U1.W13 | length 25.7
  MidLayer1 w0.2: v1(29.3,8.4) 29.3,27.609 30.4,28.709 30.4,29.4 v1(32,31)
  Bottom Layer w0.2: v1(29.3,8.4) HDR2.37@29.3,9.7 ; U1.W13@31.5,31.5 v1(32,31)
IO16: HDR2.39 U1.Y13 | length 24.4
  MidLayer1 w0.2: v1(30.1,8.4) 30.1,27.843 32,29.743 v1(32,30)
  Bottom Layer w0.2: v1(30.1,8.4) HDR2.39@30.1,9.7 ; U1.Y13@31.5,30.5 v1(32,30)
IO17: HDR2.41 U1.W12 | length 25.5
  MidLayer1 w0.127: 32.5,29.5 32.5,30.5
  MidLayer1 w0.2: v1(30.9,8.4) 30.9,27.9 32.5,29.5 ; 32.5,30.5 v1(33,31)
  Bottom Layer w0.2: v1(30.9,8.4) HDR2.41@30.9,9.7 ; U1.W12@32.5,31.5 v1(33,31)
IO18: HDR2.43 U1.Y12 | length 24.3
  MidLayer1 w0.2: v1(31.7,8.4) 31.7,22.3 31.5,22.5 31.5,27.934 32.351,28.786 33,29.434 v1(33,30)
  Bottom Layer w0.2: v1(31.7,8.4) HDR2.43@31.7,9.7 ; U1.Y12@32.5,30.5 v1(33,30)
IO19: HDR2.45 U1.W11 | length 25.2
  MidLayer1 w0.127: 33.5,29.6 33.5,30.5
  MidLayer1 w0.2: v1(32.5,8.4) 32.5,22.4 32.7,22.6 32.7,28.569 33.5,29.369 33.5,29.6 ; 33.5,30.5 v1(34,31)
  Bottom Layer w0.2: v1(32.5,8.4) HDR2.45@32.5,9.7 ; U1.W11@33.5,31.5 v1(34,31)
IO20: HDR2.47 U1.Y11 | length 23.9
  MidLayer1 w0.2: v1(33.3,8.4) 33.3,28.603 34,29.303 v1(34,30)
  Bottom Layer w0.2: v1(33.3,8.4) HDR2.47@33.3,9.7 ; U1.Y11@33.5,30.5 v1(34,30)
IO21: HDR2.49 U1.W10 | length 25.1
  MidLayer1 w0.128: 34.5,29.5 34.5,30.5
  MidLayer1 w0.2: v1(34.1,8.4) 34.1,20.6 34.1,23.4 34,23.5 34,28.737 34.5,29.237 34.5,29.5 ; 34.5,30.5 v1(35,31)
  Bottom Layer w0.2: v1(34.1,8.4) HDR2.49@34.1,9.7 ; U1.W10@34.5,31.5 v1(35,31)
IO22: HDR2.51 U1.Y10 | length 23.8
  MidLayer1 w0.2: v1(34.9,8.4) 34.9,23.2 35.2,23.5 35.2,24.5 35,24.7 v1(35,30)
  Bottom Layer w0.2: U1.Y10@34.5,30.5 v1(35,30) ; v1(34.9,8.4) HDR2.51@34.9,9.7
IO23: HDR2.53 U1.W9 | length 24.9
  MidLayer1 w0.127: 35.5,29.5 35.5,30.5
  MidLayer1 w0.2: 35.5,29.5 35.5,28.309 35.7,28.109 v1(35.7,8.4) ; 35.5,30.5 v1(36,31)
  Bottom Layer w0.2: U1.W9@35.5,31.5 v1(36,31) ; v1(35.7,8.4) HDR2.53@35.7,9.7
IO24: HDR2.55 U1.Y9 | length 23.8
  MidLayer1 w0.2: v1(36,30) 36,28.375 36.5,27.875 v1(36.5,8.4)
  Bottom Layer w0.2: U1.Y9@35.5,30.5 v1(36,30) ; v1(36.5,8.4) HDR2.55@36.5,9.7
IO25: HDR2.57 U1.W8 | length 25.1
  MidLayer1 w0.127: 36.5,29.5 36.5,30.5
  MidLayer1 w0.2: 36.5,29.5 36.5,28.44 37.3,27.64 v1(37.3,8.4) ; 36.5,30.5 v1(37,31)
  Bottom Layer w0.2: U1.W8@36.5,31.5 v1(37,31) ; v1(37.3,8.4) HDR2.57@37.3,9.7
IO26: HDR2.59 U1.Y8 | length 24.1
  MidLayer1 w0.2: v1(37,30) 37,28.506 38.1,27.406 v1(38.1,8.4)
  Bottom Layer w0.2: U1.Y8@36.5,30.5 v1(37,30) ; v1(38.1,8.4) HDR2.59@38.1,9.7
IO27: HDR2.61 U1.W7 | length 25.4
  MidLayer1 w0.127: 37.5,29.5 37.5,30.5
  MidLayer1 w0.2: 37.5,29.5 37.5,28.572 38.9,27.172 v1(38.9,8.4) ; 37.5,30.5 v1(38,31)
  Bottom Layer w0.2: U1.W7@37.5,31.5 v1(38,31) ; v1(38.9,8.4) HDR2.61@38.9,9.7
IO28: HDR2.63 U1.Y7 | length 24.3
  MidLayer1 w0.2: v1(38,30) 38,28.637 39.7,26.937 v1(39.7,8.4)
  Bottom Layer w0.2: U1.Y7@37.5,30.5 v1(38,30) ; v1(39.7,8.4) HDR2.63@39.7,9.7
IO29: HDR2.65 U1.W6 | length 25.6
  MidLayer1 w0.127: 38.5,29.5 38.5,30.5
  MidLayer1 w0.2: 38.5,29.5 38.5,28.703 40.5,26.703 v1(40.5,8.4) ; 38.5,30.5 v1(39,31)
  Bottom Layer w0.2: U1.W6@38.5,31.5 v1(39,31) ; v1(40.5,8.4) HDR2.65@40.5,9.7
IO30: HDR2.67 U1.Y6 | length 24.6
  MidLayer1 w0.2: v1(39,30) 39,28.769 41.3,26.469 v1(41.3,8.4)
  Bottom Layer w0.2: U1.Y6@38.5,30.5 v1(39,30) ; v1(41.3,8.4) HDR2.67@41.3,9.7
IO31: HDR2.69 U1.W5 | length 25.9
  MidLayer1 w0.127: 39.5,29.5 39.5,30.5
  MidLayer1 w0.2: 39.5,29.5 39.5,28.834 42.1,26.234 v1(42.1,8.4) ; 39.5,30.5 v1(40,31)
  Bottom Layer w0.2: U1.W5@39.5,31.5 v1(40,31) ; v1(42.1,8.4) HDR2.69@42.1,9.7
IO32: HDR2.71 U1.Y5 | length 24.8
  MidLayer1 w0.2: v1(40,30) 40,28.9 42.9,26 v1(42.9,8.4)
  Bottom Layer w0.2: U1.Y5@39.5,30.5 v1(40,30) ; v1(42.9,8.4) HDR2.71@42.9,9.7
IO33: HDR2.73 U1.W3 | length 26.3
  MidLayer1 w0.2: v1(41,31) 41.9,31 43.7,29.2 v1(43.7,8.4)
  Bottom Layer w0.2: v1(41,31) U1.W3@41.5,31.5 ; v1(43.7,8.4) HDR2.73@43.7,9.7
IO34: HDR2.75 U1.Y1 | length 24.4
  MidLayer1 w0.2: v1(44.5,8.4) v1(44.5,26.1)
  Bottom Layer w0.2: U1.Y1@43.5,30.5 44,30.5 44.9,29.6 44.9,27.334 44.5,26.934 v1(44.5,26.1) ; v1(44.5,8.4) HDR2.75@44.5,9.7
IO35: HDR2.77 U1.W2 | length 26.3
  MidLayer1 w0.2: v1@45.1,26.5 45.3,26.3 v1(45.3,8.4)
  Bottom Layer w0.2: U1.W2@42.5,31.5 43,31 44.1,31 45.3,29.8 v1(45.3,26.5) ; v1(45.3,8.4) HDR2.77@45.3,9.7
JIOA0: HDR1.3 U1.C21 | length 18
  Bottom Layer w0.2: HDR1.3@15.7,60.5 15.7,57.534 20.6,52.634 20.6,47.866 20.766,47.7 21.7,47.7 22,48 23,48 U1.C21@23.5,47.5
JIOA1: HDR1.5 U1.B20 | length 15.3
  Bottom Layer w0.2: HDR1.5@16.5,60.5 16.5,57.3 24,49.8 24,49 U1.B20@24.5,48.5
JIOA2: HDR1.7 U1.A20 | length 14
  Bottom Layer w0.2: HDR1.7@17.3,60.5 17.3,57.1 24.5,49.9 U1.A20@24.5,49.5
JIOA3: HDR1.9 U1.B19 | length 15.1
  Bottom Layer w0.2: HDR1.9@18.1,60.5 18.1,56.9 25,50 25,49 U1.B19@25.5,48.5
JIOB0: HDR1.83 U1.E2 | length 18
  Bottom Layer w0.2: U1.E2@42.5,45.5 43,46 44.4,46 47.7,49.3 HDR1.83@47.7,60.5
JIOB1: HDR1.85 U1.E1 | length 17.7
  Bottom Layer w0.2: U1.E1@43.5,45.5 44.5,45.5 48.1,49.1 48.1,59.1 48.5,59.5 HDR1.85@48.5,60.5
JIOB2: HDR1.87 U1.F2 | length 19.8
  Bottom Layer w0.2: U1.F2@42.5,44.5 43,45 44.6,45 48.5,48.9 48.5,58.7 49.3,59.5 HDR1.87@49.3,60.5
JIOB3: HDR1.89 U1.F1 | length 19.4
  Bottom Layer w0.2: U1.F1@43.5,44.5 44.7,44.5 48.9,48.7 48.9,58.4 50.1,59.6 HDR1.89@50.1,60.5
KBCLOCK: HDR1.22 U1.D13 | length 27
  MidLayer1 w0.127: 30.5,47.5 30.5,48.5
  MidLayer1 w0.2: v1(22.9,68.6) 22.9,56.625 30.5,49.025 30.5,48.5 ; 30.5,47.5 v1(31,47)
  Bottom Layer w0.2: HDR1.22@22.9,67.3 v1(22.9,68.6) ; v1(31,47) U1.D13@31.5,46.5
KBDATA: HDR1.24 U1.C13 | length 25.6
  MidLayer1 w0.2: v1(23.7,68.6) 23.7,56.391 31,49.091 v1(31,48)
  Bottom Layer w0.2: HDR1.24@23.7,67.3 v1(23.7,68.6) ; v1(31,48) U1.C13@31.5,47.5
LCD_BCKL: HDR2.22 U1.Y22 | length 15.7
  Bottom Layer w0.2: U1.Y22@22.5,30.5 21.9,30.5 21.1,29.7 21.1,27.063 22.9,25.263 HDR2.22@22.9,16.5
LCD_E: HDR2.26 U1.AA20 | length 13.4
  Bottom Layer w0.2: HDR2.26@24.5,16.5 24.5,17.6 24,18.1 24,29 U1.AA20@24.5,29.5
LED0: HDR2.60 U1.AB11 | length 13.9
  Bottom Layer w0.2: U1.AB11@33.5,28.5 33.5,22.2 38.1,17.6 HDR2.60@38.1,16.5
LED1: HDR2.62 U1.AA10 | length 15.2
  Bottom Layer w0.2: U1.AA10@34.5,29.5 34,29 34,22.5 38.9,17.6 HDR2.62@38.9,16.5
LED2: HDR2.64 U1.AB10 | length 14.2
  Bottom Layer w0.2: U1.AB10@34.5,28.5 34.5,25.1 35.2,24.4 35.2,22.1 39.7,17.6 HDR2.64@39.7,16.5
LED3: HDR2.66 U1.AA9 | length 15.5
  Bottom Layer w0.2: U1.AA9@35.5,29.5 35,29 35,25.2 35.6,24.6 35.6,22.5 40.5,17.6 HDR2.66@40.5,16.5
LED4: HDR2.68 U1.AB9 | length 14.4
  Bottom Layer w0.2: U1.AB9@35.5,28.5 35.5,25.3 36,24.8 36,22.9 41.3,17.6 HDR2.68@41.3,16.5
LED5: HDR2.70 U1.AA8 | length 15.7
  Bottom Layer w0.2: U1.AA8@36.5,29.5 36,29 36,25.4 36.4,25 36.4,23.3 42.1,17.6 HDR2.70@42.1,16.5
LED6: HDR2.72 U1.AB8 | length 14.7
  Bottom Layer w0.2: U1.AB8@36.5,28.5 36.5,25.5 36.8,25.2 36.8,23.7 42.9,17.6 HDR2.72@42.9,16.5
LED7: HDR2.74 U1.AA7 | length 16
  Bottom Layer w0.2: U1.AA7@37.5,29.5 37,29 37,25.6 37.2,25.4 37.2,24.1 43.7,17.6 HDR2.74@43.7,16.5
MOUSECLOCK: HDR1.26 U1.D12 | length 26.7
  MidLayer1 w0.127: 31.5,47.5 31.5,48.5
  MidLayer1 w0.2: v1(24.5,68.6) 24.5,56.157 31.5,49.157 31.5,48.5 ; 31.5,47.5 v1(32,47)
  Bottom Layer w0.2: HDR1.26@24.5,67.3 v1(24.5,68.6) ; v1(32,47) U1.D12@32.5,46.5
MOUSEDATA: HDR1.28 U1.C12 | length 25.4
  MidLayer1 w0.2: v1(25.3,68.6) 25.3,55.923 32,49.223 v1(32,48)
  Bottom Layer w0.2: HDR1.28@25.3,67.3 v1(25.3,68.6) ; v1(32,48) U1.C12@32.5,47.5
NetLED1_1: LED1.1 R4.2 | length 3.2
  Top Layer w0.3: R4.2@15.95,4 17.45,5.5 LED1.1@18.55,5.5
NetLED1_2: LED1.2 U2.4 | length 3.3
  Top Layer w0.3: LED1.2@20.45,5.5 21.475,5.5 U2.4@23.05,3.925
NetLED2_1: LED2.1 R3.2 | length 2.1
  Top Layer w0.3: R3.2@46.45,5.5 LED2.1@48.55,5.5
NEXUS_TCK: HDR1.82 U1.C6 | length 25.9
  MidLayer1 w0.2: v1(39,48) 45.3,54.3 45.3,64.4 46.9,66 v1(46.9,68.6)
  Bottom Layer w0.2: U1.C6@38.5,47.5 v1(39,48) ; HDR1.82@46.9,67.3 v1(46.9,68.6)
NEXUS_TDI: HDR1.84 U1.C5 | length 25.8
  MidLayer1 w0.2: v1(40,48) 46.029,54.029 46.029,64.229 47.7,65.9 v1(47.7,68.6)
  Bottom Layer w0.2: U1.C5@39.5,47.5 v1(40,48) ; HDR1.84@47.7,67.3 v1(47.7,68.6)
NEXUS_TDO: HDR1.76 U1.C8 | length 25.7
  MidLayer1 w0.2: v1(37,48) 37,48.8 43.3,55.1 43.3,65.1 44.5,66.3 v1(44.5,68.6)
  Bottom Layer w0.2: U1.C8@36.5,47.5 v1(37,48) ; HDR1.76@44.5,67.3 v1(44.5,68.6)
NEXUS_TMS: HDR1.80 U1.C7 | length 26
  MidLayer1 w0.2: v1(38,48) 44.6,54.6 44.6,64.6 46.1,66.1 v1(46.1,68.6)
  Bottom Layer w0.2: U1.C7@37.5,47.5 v1(38,48) ; HDR1.80@46.1,67.3 v1(46.1,68.6)
RAM0_DATA0: HDR2.42 U1.AA16 | length 14.4
  Bottom Layer w0.2: U1.AA16@28.5,29.5 28,29 28,20.5 30.9,17.6 HDR2.42@30.9,16.5
RAM0_DATA1: HDR2.40 U1.AB17 | length 13.1
  Bottom Layer w0.2: U1.AB17@27.5,28.5 27.5,20.2 30.1,17.6 HDR2.40@30.1,16.5
RAM0_DATA2: HDR2.38 U1.AA17 | length 14.2
  Bottom Layer w0.2: U1.AA17@27.5,29.5 27,29 27,19.9 29.3,17.6 HDR2.38@29.3,16.5
RAM0_DATA3: HDR2.36 U1.AB18 | length 12.8
  Bottom Layer w0.2: U1.AB18@26.5,28.5 26.5,19.6 28.5,17.6 HDR2.36@28.5,16.5
RAM0_DATA4: HDR2.34 U1.AA18 | length 13.9
  Bottom Layer w0.2: U1.AA18@26.5,29.5 26,29 26,19.3 27.7,17.6 HDR2.34@27.7,16.5
RAM0_DATA5: HDR2.32 U1.AB19 | length 12.6
  Bottom Layer w0.2: U1.AB19@25.5,28.5 25.5,19 26.9,17.6 HDR2.32@26.9,16.5
RAM0_DATA6: HDR2.30 U1.AA19 | length 13.7
  Bottom Layer w0.2: U1.AA19@25.5,29.5 25,29 25,18.7 26.1,17.6 HDR2.30@26.1,16.5
RAM0_DATA7: HDR2.28 U1.AB20 | length 12.3
  Bottom Layer w0.2: U1.AB20@24.5,28.5 24.5,18.4 25.3,17.6 HDR2.28@25.3,16.5
RAM0_OE: HDR1.41 U1.B11 | length 13.1
  Bottom Layer w0.2: HDR1.41@30.9,60.5 30.9,54.6 31.3,54.2 31.3,52.751 33,51.051 33,49 U1.B11@33.5,48.5
RAM0_WE: HDR1.79 U1.D2 | length 16.2
  Bottom Layer w0.2: U1.D2@42.5,46.5 43,47 44.2,47 46.1,48.9 HDR1.79@46.1,60.5
RAM1_DATA0: HDR1.45 U1.A10 | length 11.8
  Bottom Layer w0.2: HDR1.45@32.5,60.5 32.5,59.4 33.3,58.6 33.3,52.666 34.5,51.466 U1.A10@34.5,49.5
RAM1_DATA1: HDR1.49 U1.A9 | length 11.6
  Bottom Layer w0.2: HDR1.49@34.1,60.5 34.1,52.997 35.5,51.597 U1.A9@35.5,49.5
RAM1_DATA2: HDR1.53 U1.A8 | length 11.3
  Bottom Layer w0.2: HDR1.53@35.7,60.5 35.7,52.528 36.5,51.728 U1.A8@36.5,49.5
RAM1_DATA3: HDR1.57 U1.A7 | length 11.1
  Bottom Layer w0.2: HDR1.57@37.3,60.5 37.3,52.06 37.5,51.86 U1.A7@37.5,49.5
RAM1_DATA4: HDR1.55 U1.B7 | length 12.4
  Bottom Layer w0.2: HDR1.55@36.5,60.5 36.5,52.294 37,51.794 37,49 U1.B7@37.5,48.5
RAM1_DATA5: HDR1.51 U1.B8 | length 13.2
  Bottom Layer w0.2: 34.9,54.366 HDR1.51@34.9,60.5 ; 34.9,54.9 34.9,52.763 36,51.663 36,49 U1.B8@36.5,48.5
RAM1_DATA6: HDR1.47 U1.B9 | length 12.9
  Bottom Layer w0.2: HDR1.47@33.3,60.5 33.3,59.4 33.7,59 33.7,52.831 35,51.531 35,49 U1.B9@35.5,48.5
RAM1_DATA7: HDR1.43 U1.B10 | length 13.2
  Bottom Layer w0.2: HDR1.43@31.7,60.5 31.7,59.4 32.9,58.2 32.9,52.5 34,51.4 34,49 U1.B10@34.5,48.5
RAM1_OE: HDR1.39 U1.A12 | length 12.6
  Bottom Layer w0.2: HDR1.39@30.1,60.9 30.1,54.7 29.9,54.5 29.9,53.585 32.5,50.985 U1.A12@32.5,49.5
RAM1_WE: HDR1.61 U1.A6 | length 11.2
  Bottom Layer w0.2: U1.A6@38.5,49.5 38.5,50.731 38.9,51.131 HDR1.61@38.9,60.5
RAM_ADDR0: HDR1.21 U1.B16 | length 14.3
  Bottom Layer w0.2: HDR1.21@22.9,60.5 22.9,55.494 28,50.394 28,49 U1.B16@28.5,48.5
RAM_ADDR1: HDR1.25 U1.B15 | length 14.1
  Bottom Layer w0.2: HDR1.25@24.5,60.5 24.5,55.025 29,50.525 29,49 U1.B15@29.5,48.5
RAM_ADDR2: HDR1.29 U1.B14 | length 13.8
  Bottom Layer w0.2: HDR1.29@26.1,60.5 26.1,54.557 30,50.657 30,49 U1.B14@30.5,48.5
RAM_ADDR3: HDR1.33 U1.B13 | length 13.6
  Bottom Layer w0.2: HDR1.33@27.7,60.5 27.7,54.088 31,50.788 31,49 U1.B13@31.5,48.5
RAM_ADDR4: HDR1.65 U1.A5 | length 11.4
  Bottom Layer w0.2: U1.A5@39.5,49.5 39.5,50.6 40.5,51.6 HDR1.65@40.5,60.5
RAM_ADDR5: HDR1.69 U1.A4 | length 11.7
  Bottom Layer w0.2: U1.A4@40.5,49.5 40.5,50.231 42.1,51.831 HDR1.69@42.1,60.5
RAM_ADDR6: HDR1.73 U1.A3 | length 11.9
  Bottom Layer w0.2: U1.A3@41.5,49.5 43.7,51.7 43.7,52.3 HDR1.73@43.7,60.5
RAM_ADDR7: HDR1.77 U1.C1 | length 14.4
  Bottom Layer w0.2: U1.C1@43.5,47.5 44.1,47.5 45.3,48.7 45.7,49.1 45.7,52.1 45.3,52.5 45.3,52.6 HDR1.77@45.3,60.5
RAM_ADDR8: HDR1.75 U1.C2 | length 14.7
  Bottom Layer w0.2: U1.C2@42.5,47.5 43,48 43.9,48 44.9,49 44.9,51.3 44.5,51.7 HDR1.75@44.5,60.5
RAM_ADDR9: HDR1.71 U1.B3 | length 13
  Bottom Layer w0.2: U1.B3@41.5,48.5 41,49 41,50.166 42.9,52.066 HDR1.71@42.9,60.5
RAM_ADDR10: HDR1.67 U1.B4 | length 12.7
  Bottom Layer w0.2: U1.B4@40.5,48.5 40,49 40,50.297 41.3,51.597 HDR1.67@41.3,60.5
RAM_ADDR11: HDR1.63 U1.B5 | length 12.5
  Bottom Layer w0.2: U1.B5@39.5,48.5 39,49 39,50.666 39.7,51.366 HDR1.63@39.7,60.5
RAM_ADDR12: HDR1.59 U1.B6 | length 12.2
  Bottom Layer w0.2: HDR1.59@38.1,60.5 38.1,51.1 38,51 38,49 U1.B6@38.5,48.5
RAM_ADDR13: HDR1.35 U1.A13 | length 12.2
  Bottom Layer w0.2: HDR1.35@28.5,60.5 28.5,53.854 31.5,50.854 U1.A13@31.5,49.5
RAM_ADDR14: HDR1.31 U1.A14 | length 12.5
  Bottom Layer w0.2: HDR1.31@26.9,60.5 26.9,54.323 30.5,50.723 U1.A14@30.5,49.5
RAM_ADDR15: HDR1.27 U1.A15 | length 12.7
  Bottom Layer w0.2: HDR1.27@25.3,60.5 25.3,54.791 29.5,50.591 U1.A15@29.5,49.5
RAM_ADDR16: HDR1.23 U1.A16 | length 13
  Bottom Layer w0.2: HDR1.23@23.7,60.5 23.7,55.26 28.5,50.46 U1.A16@28.5,49.5
RAM_CS: HDR1.37 U1.B12 | length 13.3
  Bottom Layer w0.2: HDR1.37@29.3,60.5 29.3,53.62 32,50.92 32,49 U1.B12@32.5,48.5
RED0: HDR1.6 U1.D17 | length 28
  MidLayer1 w0.127: 26.5,47.5 26.5,48.5
  MidLayer1 w0.2: v1(16.5,68.6) 16.5,58.5 26.5,48.5 ; 26.5,47.5 v1(27,47)
  Bottom Layer w0.2: HDR1.6@16.5,67.3 v1(16.5,68.6) ; v1(27,47) U1.D17@27.5,46.5
RED1: HDR1.8 U1.C17 | length 26.6
  MidLayer1 w0.2: v1(17.3,68.6) 17.3,58.266 27,48.566 v1(27,48)
  Bottom Layer w0.2: HDR1.8@17.3,67.3 v1(17.3,68.6) ; v1(27,48) U1.C17@27.5,47.5
REF_CLK: HDR2.4 U1.AB12 | length 26.9
  Top Layer w0.2: v1(15.1,18.2) 27.4,18.2 v1(32.1,22.9)
  Bottom Layer w0.2: v1(15.1,18.2) 15.7,17.6 HDR2.4@15.7,16.5 ; v1(32.1,22.9) 32.3,22.9 32.7,23.3 32.7,24.1 32.5,24.3 U1.AB12@32.5,28.5
SCL: HDR2.5 U1.U19 | length 33.5
  MidLayer1 w0.127: 23.668,34.5 24.3,34.5
  MidLayer1 w0.2: v1(16.5,8.4) 16.5,23.894 19.4,26.794 19.4,31.8 22.1,34.5 23.668,34.5 ; 24.3,34.5 24.5,34.5 v1(25,34)
  Bottom Layer w0.2: v1(16.5,8.4) HDR2.5@16.5,9.7 ; v1(25,34) U1.U19@25.5,33.5
SDA: HDR2.3 U1.T20 | length 33.2
  MidLayer1 w0.2: v1(15.7,8.4) 15.7,23.66 19,26.96 19,32 22,35 v1(24,35)
  Bottom Layer w0.2: v1(15.7,8.4) HDR2.3@15.7,9.7 ; v1(24,35) U1.T20@24.5,34.5
SP0: HDR2.79 U1.W1 | length 25.9
  MidLayer1 w0.2: v1(46.1,8.4) v1(46.1,24.8)
  Bottom Layer w0.2: U1.W1@43.5,31.5 44.2,31.5 45.7,30 45.7,27.469 46.1,27.069 v1(46.1,24.8) ; v1(46.1,8.4) HDR2.79@46.1,9.7
SP1: HDR2.81 U1.V2 | length 28
  MidLayer1 w0.2: v1(46.9,8.4) 46.9,18.9 v1(46.9,24.8)
  Bottom Layer w0.2: U1.V2@42.5,32.5 43,32 44.3,32 46.1,30.2 46.1,27.634 46.9,26.834 v1(46.9,24.8) ; v1(46.9,8.4) HDR2.81@46.9,9.7
SP2: HDR2.83 U1.V1 | length 27.7
  MidLayer1 w0.2: v1(47.7,8.4) v1(47.7,24.8)
  Bottom Layer w0.2: U1.V1@43.5,32.5 44,32.5 44.4,32.5 46.5,30.4 46.5,27.8 47.7,26.6 v1(47.7,24.8) ; v1(47.7,8.4) HDR2.83@47.7,9.7
SP3: HDR2.85 U1.V4 | length 29.1
  MidLayer1 w0.2: v1(41,32) 41,31.8 41.4,31.4 42.1,31.4 48.5,25 v1(48.5,8.4)
  Bottom Layer w0.2: U1.V4@40.5,32.5 v1(41,32) ; v1(48.5,8.4) HDR2.85@48.5,9.7
SP4: HDR2.87 U1.V3 | length 28.7
  MidLayer1 w0.2: v1(42,32) 42.1,32 49.3,24.8 v1(49.3,8.4)
  Bottom Layer w0.2: U1.V3@41.5,32.5 v1(42,32) ; v1(49.3,8.4) HDR2.87@49.3,9.7
SP5: HDR2.89 U1.U2 | length 32.4
  MidLayer1 w0.2: v1(47.1,28.1) 49.7,25.5 49.7,9.3 50.1,8.9 v1@50.1,7.4
  Bottom Layer w0.2: U1.U2@42.5,33.5 43,33 44.5,33 46.9,30.6 46.9,28.3 v1(47.1,28.1) ; v1@50.1,7.4 HDR2.89@50.1,9.7
  other v1: 50.1,7.2
SP6: HDR2.91 U1.U1 | length 32.4
  MidLayer1 w0.2: v1@47.3,29.2 50.1,26.4 50.1,9.5 50.9,8.7 v1(50.9,7.4)
  Bottom Layer w0.2: U1.U1@43.5,33.5 44.6,33.5 47.3,30.8 47.3,29.2 v1(47.5,29) ; v1(50.9,7.4) HDR2.91@50.9,9.7
SP7: HDR2.92 U1.Y2 | length 18.7
  Bottom Layer w0.2: U1.Y2@42.5,30.5 43,30 43.9,30 44.5,29.4 44.5,27.5 43.7,26.7 43.7,24.8 50.9,17.6 HDR2.92@50.9,16.5
SP8: HDR2.90 U1.AB3 | length 15.6
  Bottom Layer w0.2: U1.AB3@41.5,28.5 41.5,26.2 50.1,17.6 HDR2.90@50.1,16.5
SP9: HDR2.88 U1.AA3 | length 16.6
  Bottom Layer w0.2: U1.AA3@41.5,29.5 41,29 41,25.9 49.3,17.6 HDR2.88@49.3,16.5
SP10: HDR2.86 U1.AB4 | length 15.3
  Bottom Layer w0.2: U1.AB4@40.5,28.5 40.5,25.6 48.5,17.6 HDR2.86@48.5,16.5
SP11: HDR2.84 U1.AB5 | length 15.4
  Bottom Layer w0.2: U1.AB5@39.5,28.5 39.5,25.8 47.7,17.6 HDR2.84@47.7,16.5